# Altium PCB PCB1.PcbDoc (part 1 of 4)
Units mil, origin at the board's own origin, x right, y up, seen from the top; angles counter-clockwise.
Board outline 3904 x 3805 mil, 4 copper layers (Top Layer, Layer 2, Layer 3, Bottom Layer), stack 23.756 mil thick; 231 components, 342 nets, 1187 pads, 543 vias.
Unrouted connection lines stored in the file: 4.
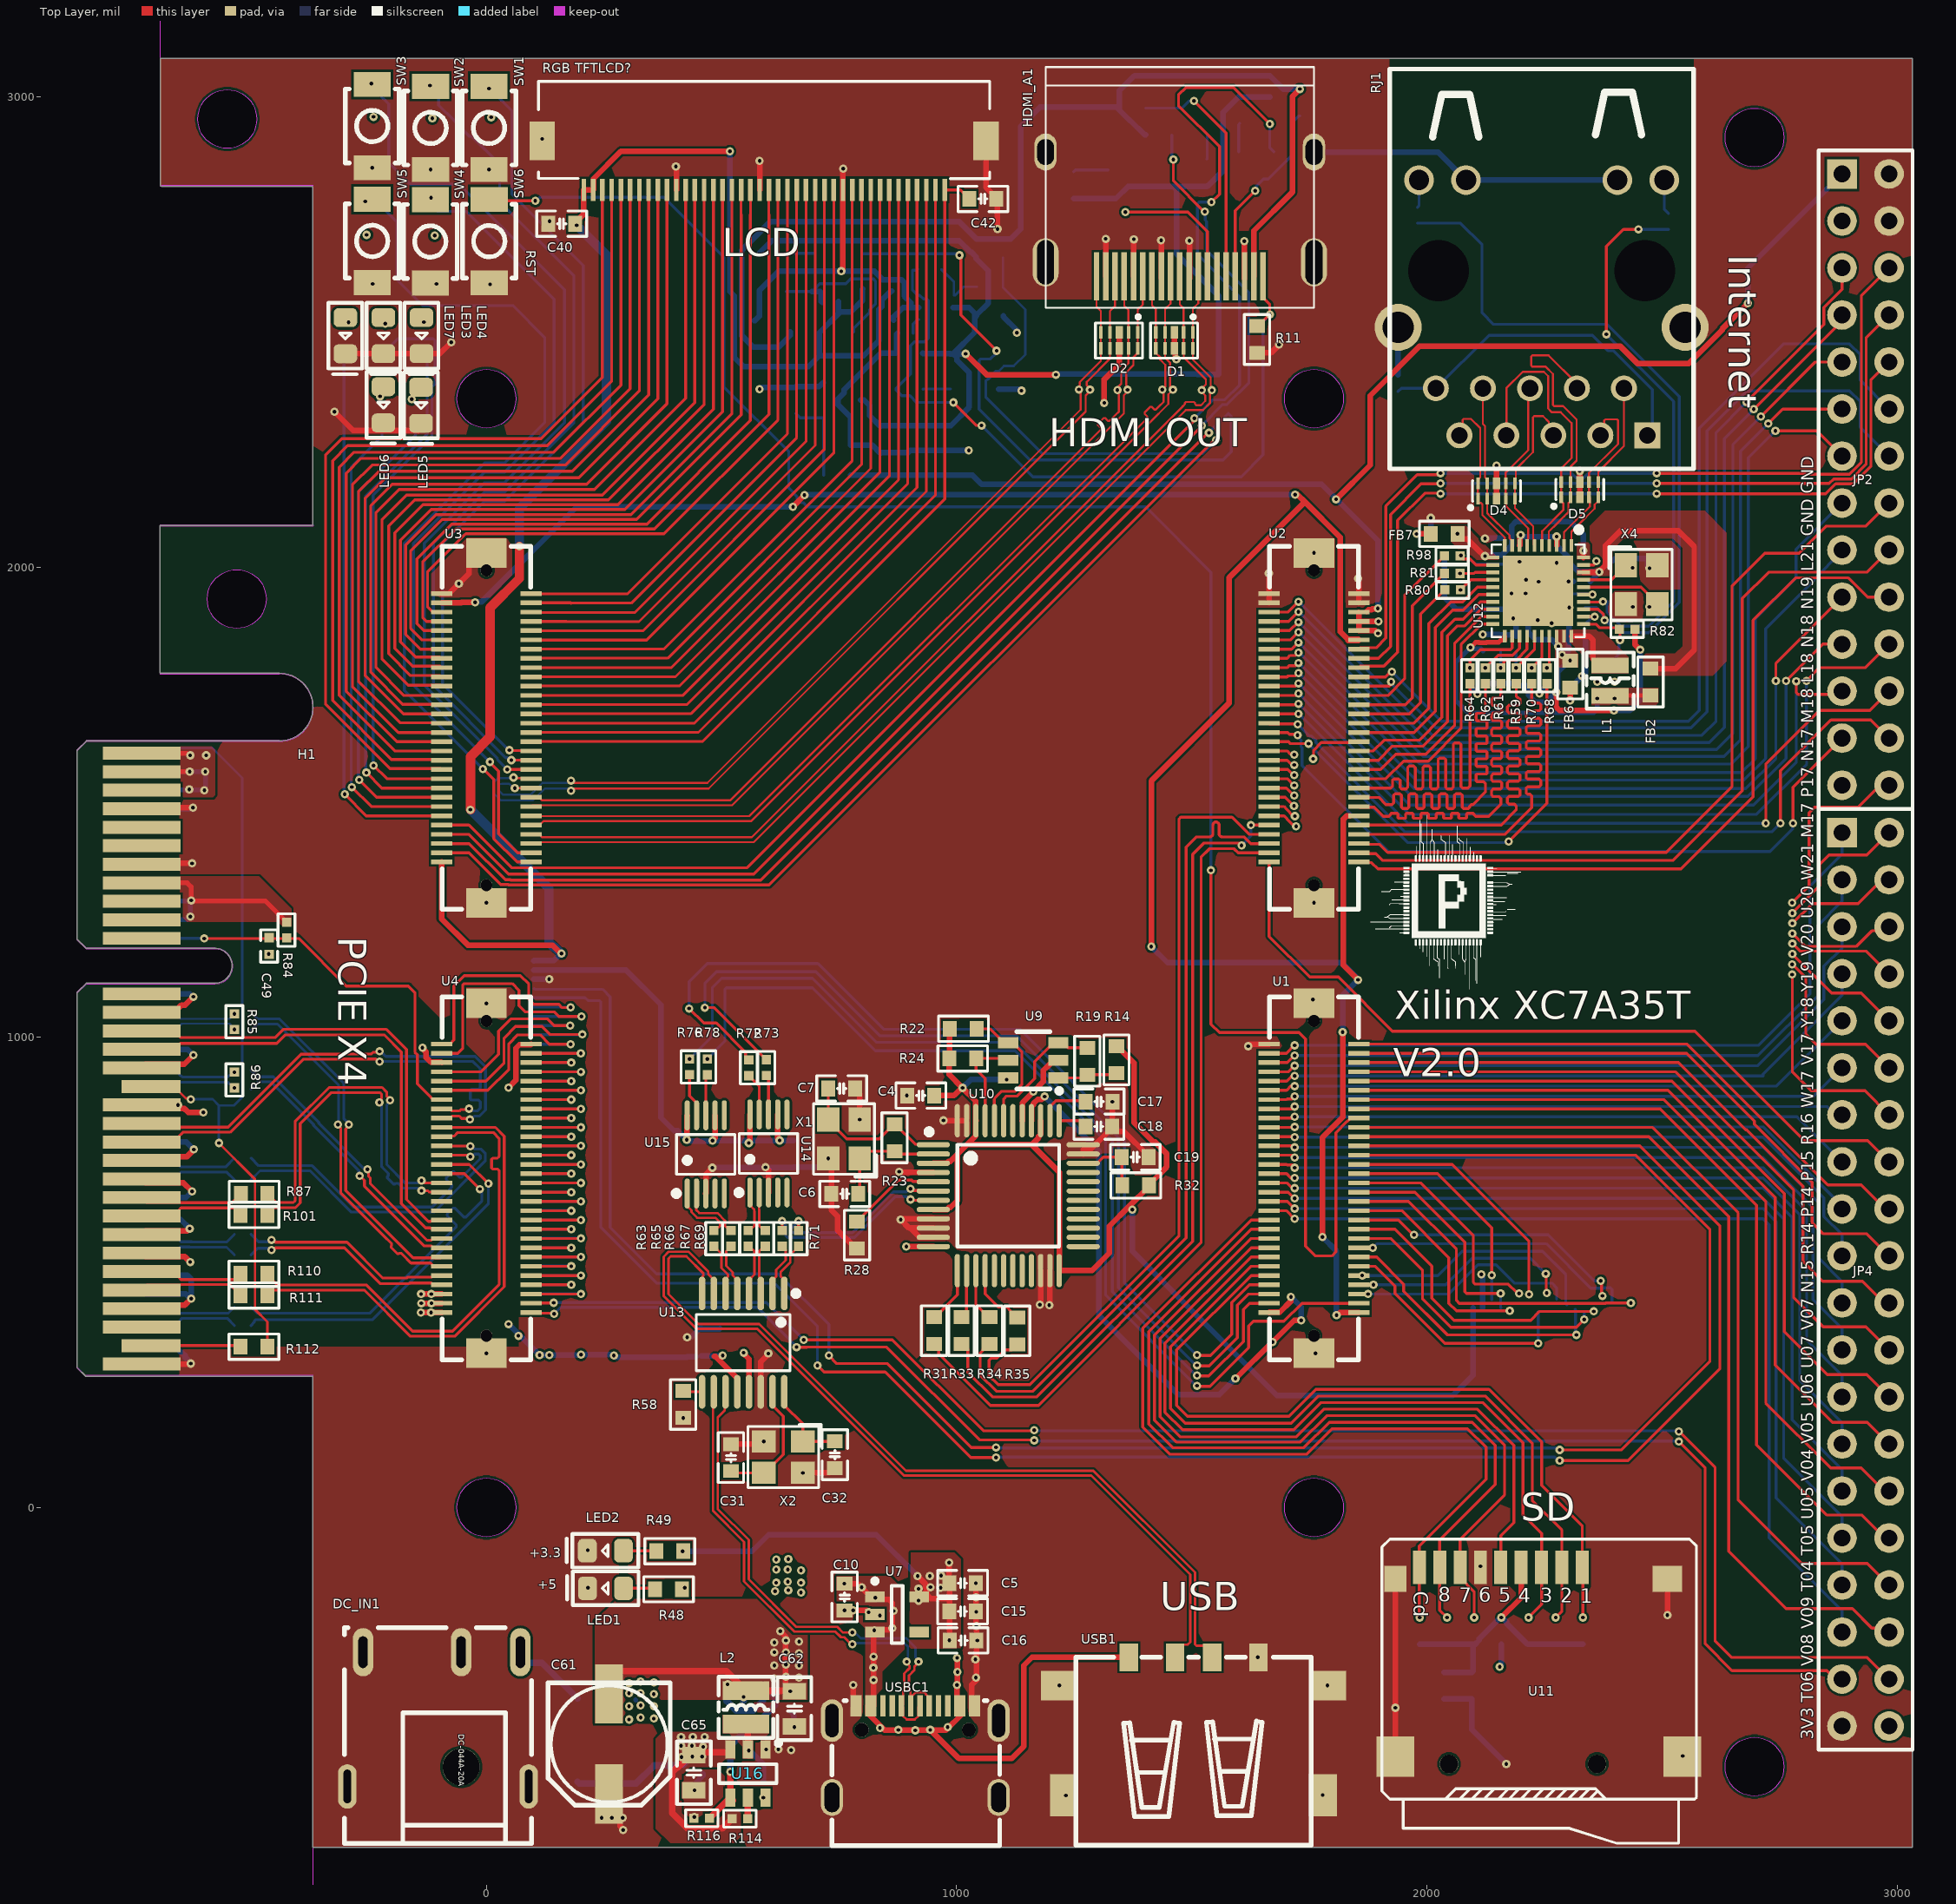
[diagram p0: Top Layer view]
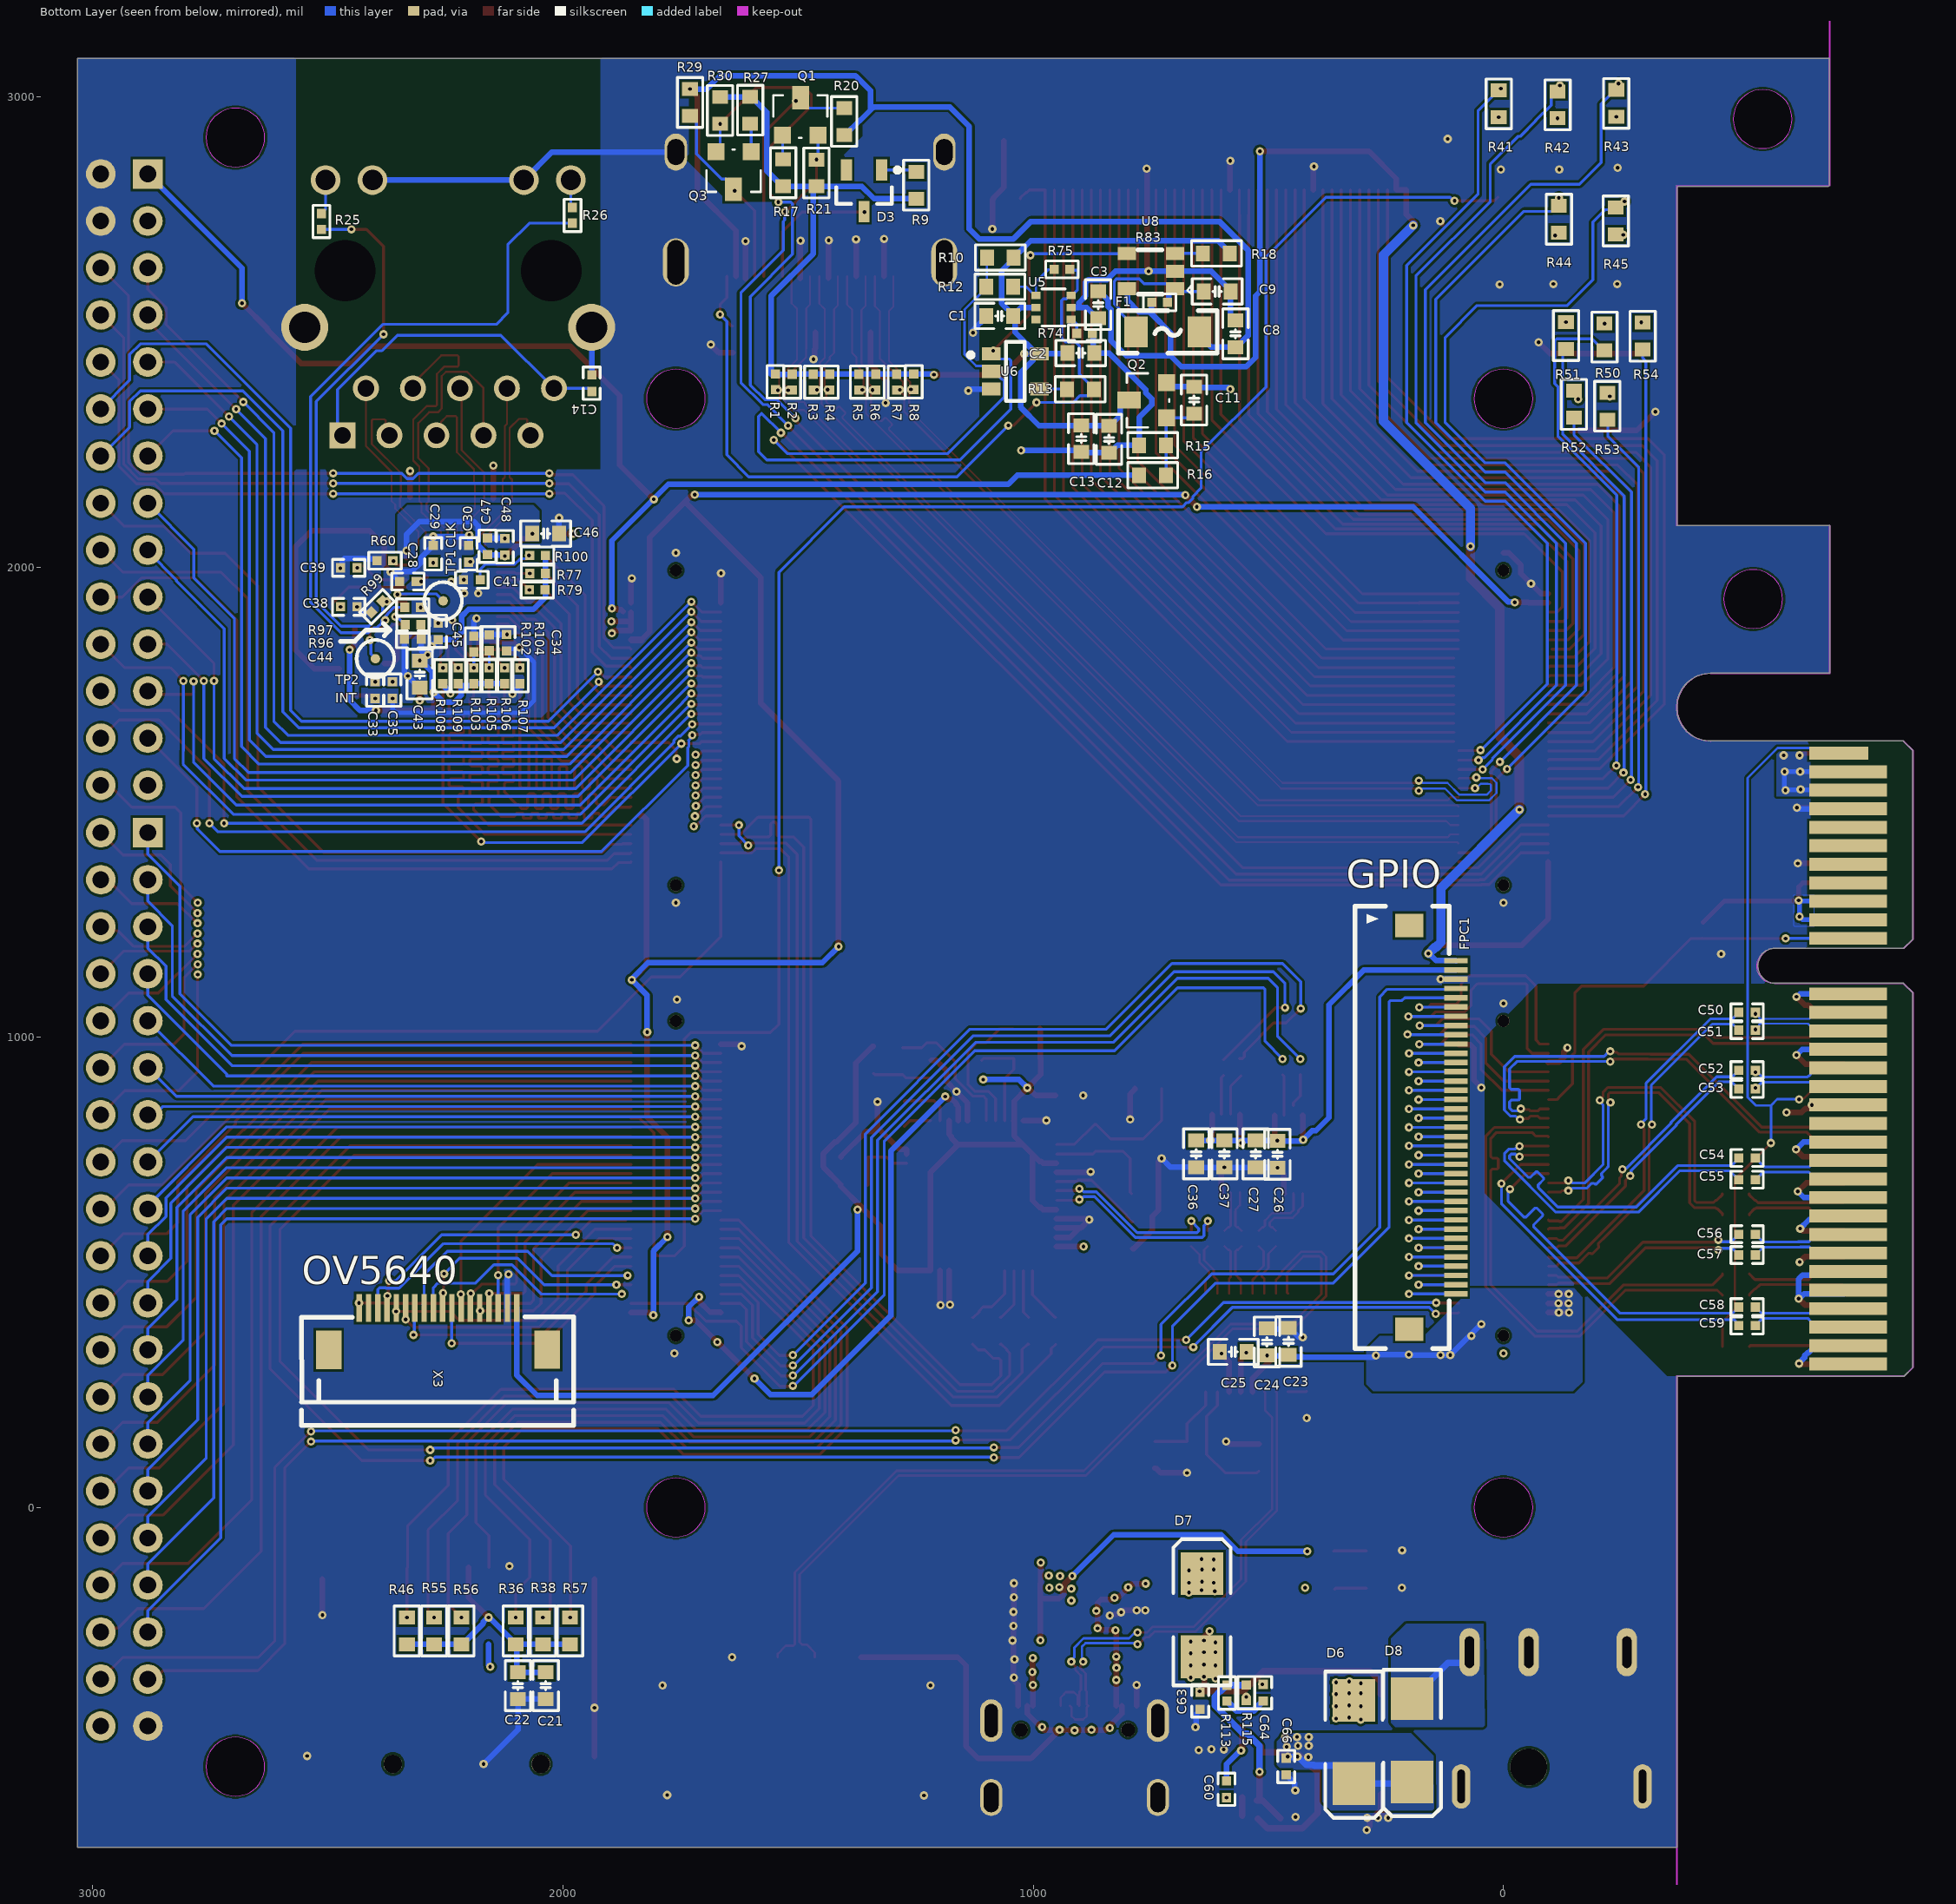
[diagram p1: Bottom Layer view, seen from below]
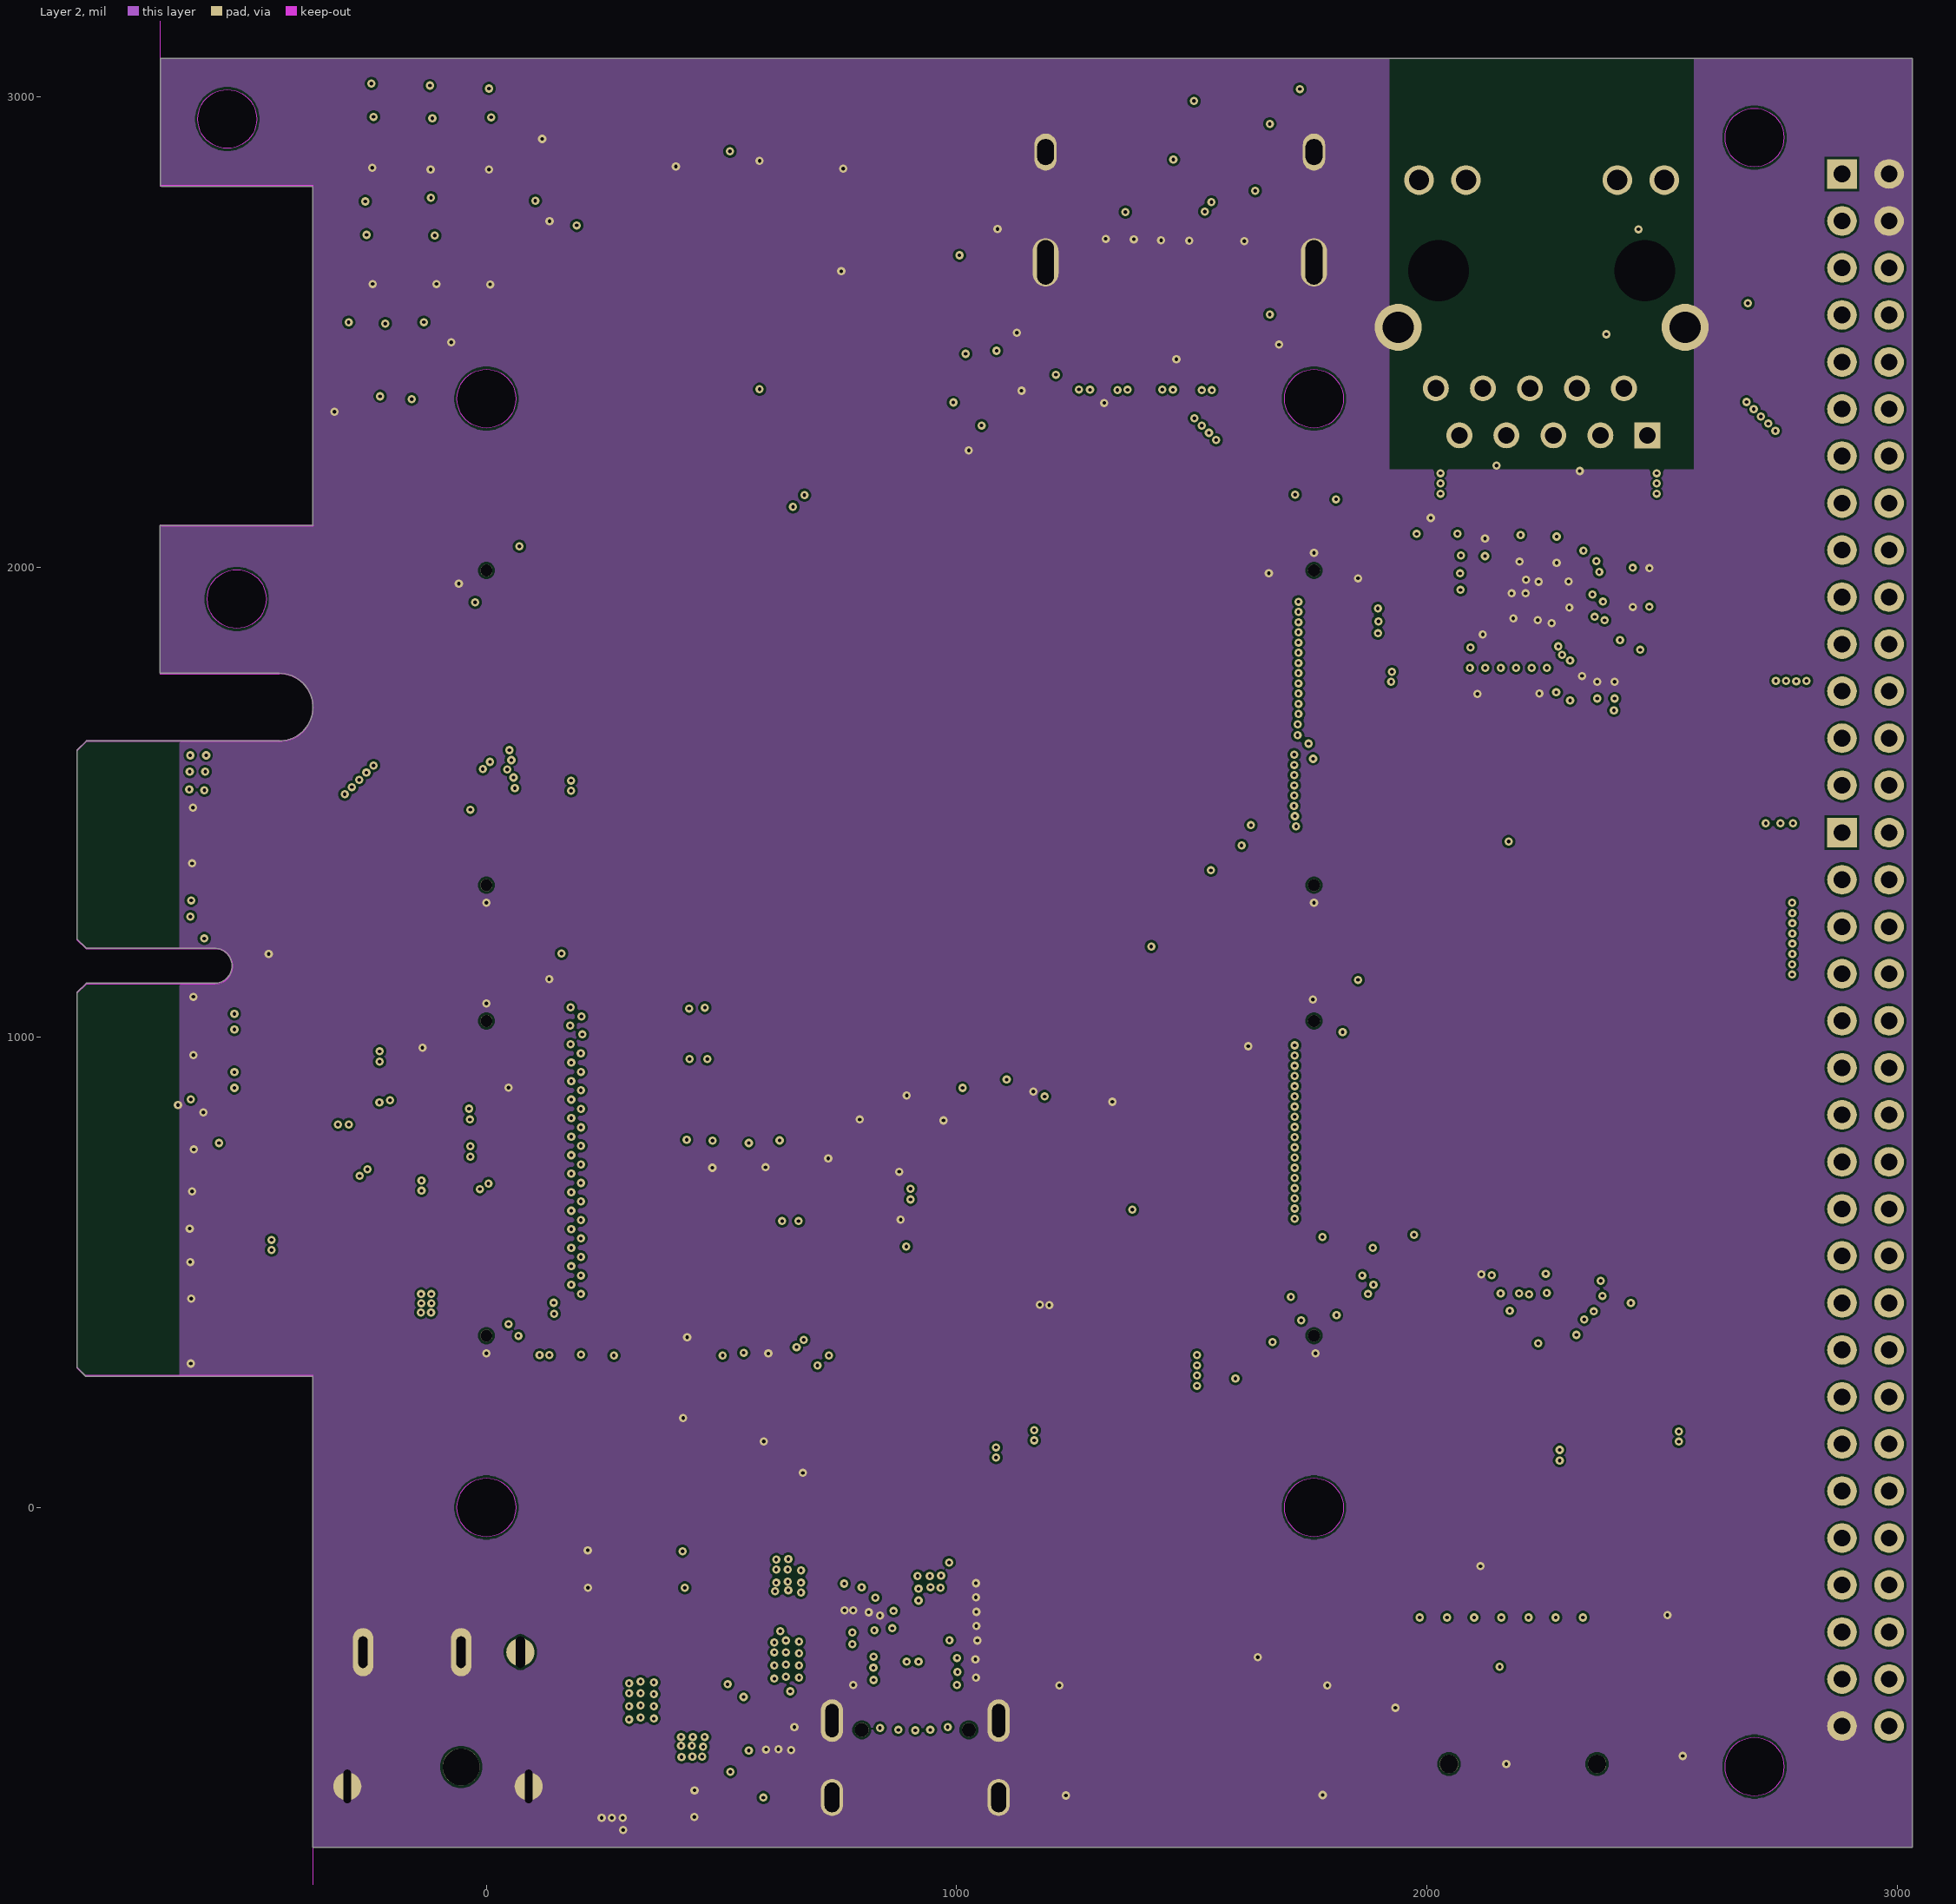
[diagram p2: Layer 2]
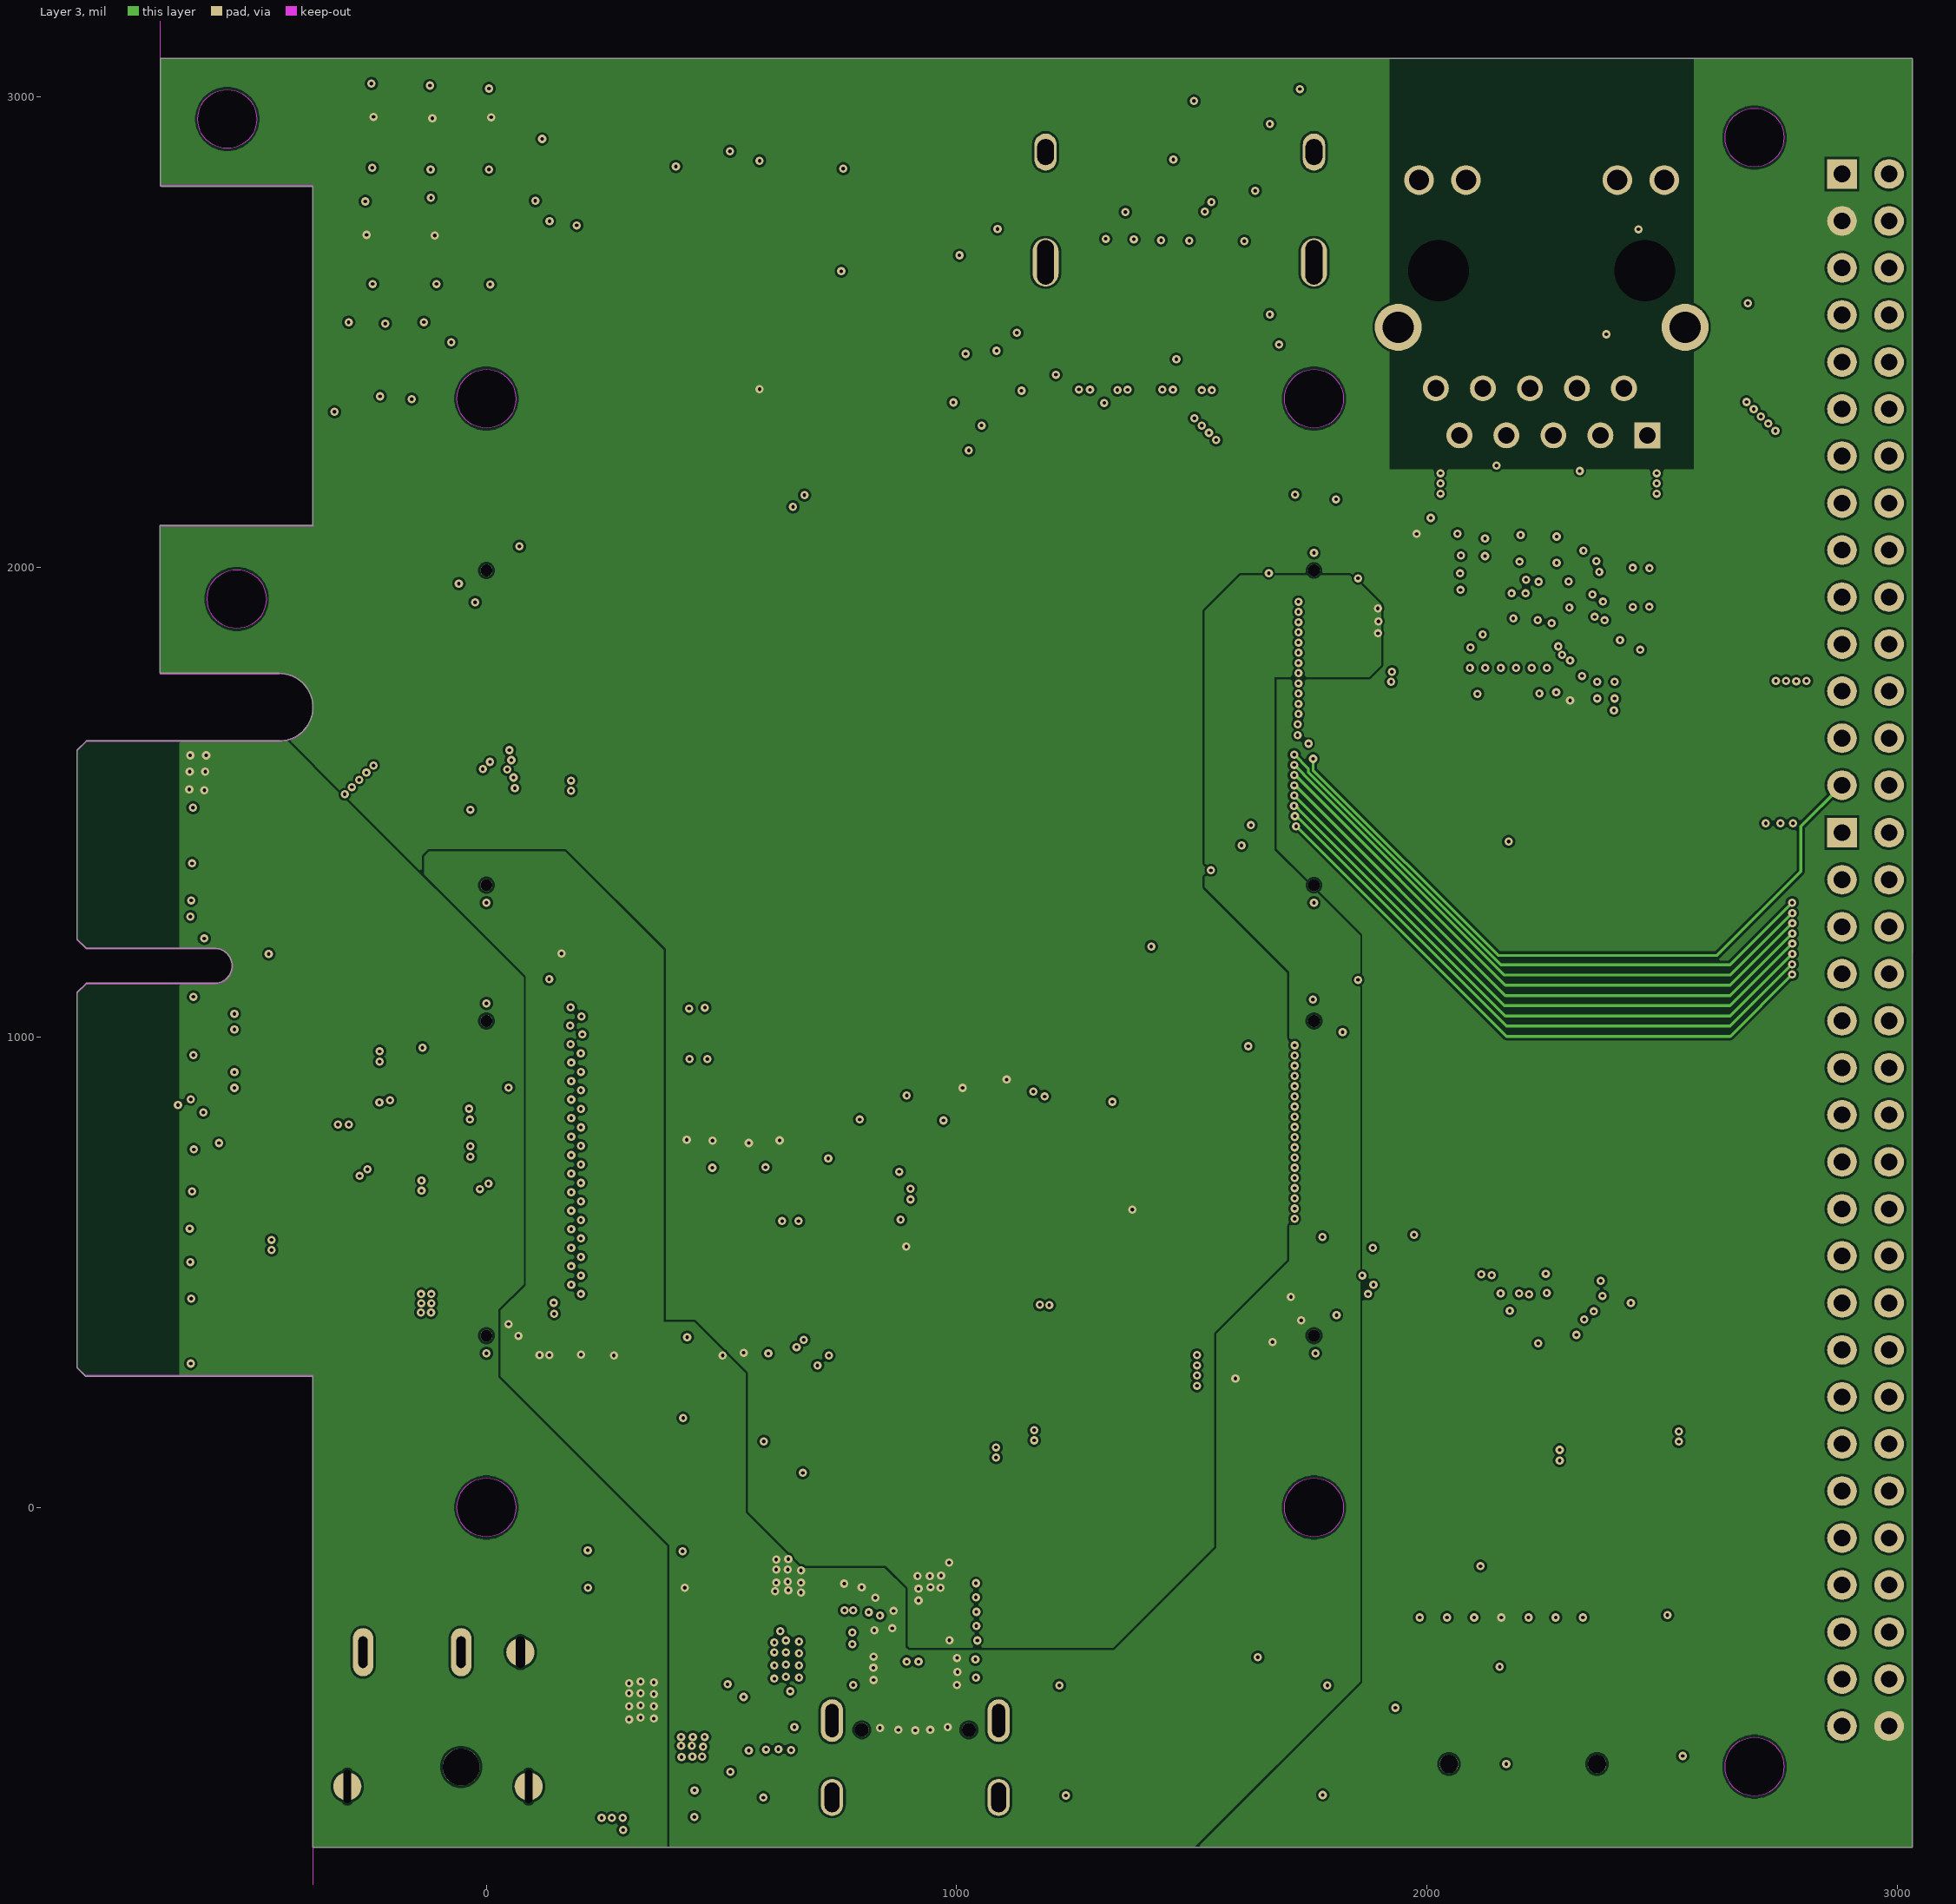
[diagram p3: Layer 3]

## Layer stack, top to bottom
Top Solder: solder mask 0.4, Solder Resist, Dk 3.5
Top Layer: signal copper 1.4
Dielectric 4: prepreg 2.8, PP-006, Dk 4.1
Layer 2: signal copper 1.378
Dielectric 1: dielectric 12.6, FR-4, Dk 4.8
Layer 3: signal copper 1.378
Dielectric 5: prepreg 2.8, PP-006, Dk 4.1
Bottom Layer: signal copper 1.4
Bottom Solder: solder mask 0.4, Solder Resist, Dk 3.5

## Board outline
-871,298 -852,279 -369,279 -369,-723 3033,-723 3033,3082 -693,3082 -693,2811 -691,2809 -370,2809 -369,2808 -369,2089 -370,2088 -694,2088 -694,1774 -441,1774 cw(c-441,1701.99) -441,1629.99 -851.01,1629.99 -871,1610 -871,1209 -851,1189 -578,1189 cw(c-578,1152) -578,1115 -851,1115 -871,1095
cut-out: 2696.85,2850.89 cw(c2696.85,2913.39) 2634.35,2913.39 cw(c2696.85,2913.39) 2696.85,2975.89 cw(c2696.85,2913.39) 2759.35,2913.39 cw(c2696.85,2913.39)
cut-out: 1760,2295.5 cw(c1760,2358) 1697.5,2358 cw(c1760,2358) 1760,2420.5 cw(c1760,2358) 1822.5,2358 cw(c1760,2358)
cut-out: 2696.85,-613.68 cw(c2696.85,-551.18) 2634.35,-551.18 cw(c2696.85,-551.18) 2696.85,-488.68 cw(c2696.85,-551.18) 2759.35,-551.18 cw(c2696.85,-551.18)
cut-out: 1760,-62.5 cw(c1760,0) 1697.5,0 cw(c1760,0) 1760,62.5 cw(c1760,0) 1822.5,0 cw(c1760,0)
cut-out: 0,-62.5 cw(c0,0) -62.5,0 cw(c0,0) 0,62.5 cw(c0,0) 62.5,0 cw(c0,0)
cut-out: -531,1869.5 cw(c-531,1932) -593.5,1932 cw(c-531,1932) -531,1994.5 cw(c-531,1932) -468.5,1932 cw(c-531,1932)
cut-out: 0,2295.5 cw(c0,2358) -62.5,2358 cw(c0,2358) 0,2420.5 cw(c0,2358) 62.5,2358 cw(c0,2358)
cut-out: -551.18,2890.26 cw(c-551.18,2952.76) -613.68,2952.76 cw(c-551.18,2952.76) -551.18,3015.26 cw(c-551.18,2952.76) -488.68,2952.76 cw(c-551.18,2952.76)

## Design rules (kind name [scope] priority, off if disabled: settings)
Clearance via_poly [IsVia vs InPoly] p1: gap=5 ignorepadtopadclearanceinfootprint=FALSE
Clearance poly [InPoly] p2: gap=5 ignorepadtopadclearanceinfootprint=FALSE
Clearance Clearance_all [All] p3: gap=4 ignorepadtopadclearanceinfootprint=FALSE
DiffPairsRouting 85ohm [InDifferentialPairClass('7a.PCIE_data')] p1: maxlimit=8 minlimit=5 mostfreqgap=8 toplayer_prefgap=5 toplayer_minwidth=5.88 toplayer_maxwidth=5.88 toplayer_prefwidth=5.88 midlayer1_prefgap=5 midlayer1_minwidth=5.88 midlayer1_maxwidth=5.88 midlayer1_prefwidth=5.88 midlayer2_prefgap=5 midlayer2_minwidth=5.88 midlayer2_maxwidth=5.88 midlayer2_prefwidth=5.88 bottomlayer_minwidth=5.88 bottomlayer_maxwidth=5.88 bottomlayer_prefwidth=5.88 maxuncoupledlength=500
DiffPairsRouting 90ohm [InDifferentialPairClass('6.USB')] p2: maxlimit=8 minlimit=5 mostfreqgap=5 toplayer_minwidth=5.1 toplayer_maxwidth=5.1 toplayer_prefwidth=5.1 midlayer1_minwidth=5.1 midlayer1_maxwidth=5.1 midlayer1_prefwidth=5.1 midlayer2_minwidth=5.1 midlayer2_maxwidth=5.1 midlayer2_prefwidth=5.1 bottomlayer_minwidth=5.1 bottomlayer_maxwidth=15 bottomlayer_prefwidth=5.1 maxuncoupledlength=500
DiffPairsRouting 100ohm [InDifferentialPairClass('1.HDMI') or InDifferentialPairClass('3.PHY') or InDifferentialPairClass('7b.PCIE_clk')] p3: maxlimit=11 minlimit=6 mostfreqgap=6 toplayer_minwidth=4.29 toplayer_maxwidth=4.29 toplayer_prefwidth=4.29 midlayer1_minwidth=4.29 midlayer1_maxwidth=4.29 midlayer1_prefwidth=4.29 midlayer2_minwidth=4.29 midlayer2_maxwidth=4.29 midlayer2_prefwidth=4.29 bottomlayer_minwidth=4.29 bottomlayer_maxwidth=4.29 bottomlayer_prefwidth=4.29 maxuncoupledlength=500
PlaneClearance [All] p1: clearance=7
PlaneConnect [All] p1: planeconnectstyle=Direct reliefexpansion=20 reliefentries=4 reliefconductorwidth=10 reliefairgap=10
PolygonConnect [All] p1: connectstyle=Direct reliefconductorwidth=10 reliefentries=4 polygonreliefangle="90 Angle" airgapwidth=10
RoutingVias [All] p1: holewidth=7.9 width=17.7 viastyle="Through Hole" minholewidth=7.9 minwidth=17.7 maxholewidth=7.9 maxwidth=17.7
SolderMaskExpansion [All] p1: expansion=4 istentingtop=FALSE
Width 50ohm [InNetClass('2.RGMII') or InNetClass('4.CMOS') or InNetClass('5.jtag')] p1: maxlimit=6.16 minlimit=6.16 preferedwidth=6.16 minimp=50.000000 maximp=50.000000 favimp=50.000000
Width power [InNetClass('8.power')] p2: maxlimit=20 minlimit=10 preferedwidth=12 minimp=50.000000 maximp=50.000000 favimp=50.000000
Width [All] p3: maxlimit=14 minlimit=5 preferedwidth=6.16
27 further rules are at their usual default settings.

## Classes and differential pairs
differential pair class 7b.PCIE_clk: MGT_CLK0 MGT_CLK0_R MGT_CLK1
differential pair class 6.USB: EXTUSB JTAG_USB JTAG_USB_R typec UART1_USB UART1_USB_R UART2_USB UART2_USB_R
net class 6.USB: EXTUSB_D+ EXTUSB_D- JTAG_DM JTAG_DM_R JTAG_DP JTAG_DP_R UART1_D+ UART1_D+_R UART1_D- UART1_D-_R UART2_D+ UART2_D+_R UART2_D- UART2_D-_R USB_DM USB_DP
net class 1.HDMI: B16_N_L18 B16_N_L20 B16_N_L22 B16_N_L23 B16_P_L18 B16_P_L20 B16_P_L22 B16_P_L23
net class 3.PHY: PHY2_MDI0N PHY2_MDI0P PHY2_MDI1N PHY2_MDI1P PHY2_MDI2N PHY2_MDI2P PHY2_MDI3N PHY2_MDI3P
differential pair class 7a.PCIE_data: MGT_CLK0 MGT_CLK1 MGT_RX_0 MGT_RX_0_R MGT_RX_1 MGT_RX_1_R MGT_RX_2 MGT_RX_3 MGT_TX_0 MGT_TX_0_R MGT_TX_1 MGT_TX_1_R MGT_TX_2 MGT_TX_2_R MGT_TX_3 MGT_TX_3_R
net class 7.PCIE: MGT_CLK0_N MGT_CLK0_N_R MGT_CLK0_P MGT_CLK0_P_R MGT_CLK1_N MGT_CLK1_P MGT_RX_N_0 MGT_RX_N_0_R MGT_RX_N_1 MGT_RX_N_1_R MGT_RX_N_2 MGT_RX_N_3 MGT_RX_P_0 MGT_RX_P_0_R MGT_RX_P_1 MGT_RX_P_1_R MGT_RX_P_2 MGT_RX_P_3 MGT_TX_N_0 MGT_TX_N_0_R MGT_TX_N_1 MGT_TX_N_1_R MGT_TX_N_2 MGT_TX_N_2_R MGT_TX_N_3 MGT_TX_N_3_R MGT_TX_P_0 MGT_TX_P_0_R MGT_TX_P_1 MGT_TX_P_1_R MGT_TX_P_2 MGT_TX_P_2_R MGT_TX_P_3 MGT_TX_P_3_R
net class 4.CMOS: B34_N_L1 B34_N_L5 B34_N_L7 B34_N_L8 B34_N_L9 B34_N_L11 B34_P_L5 B34_P_L7 B34_P_L8 B34_P_L10 B34_P_L20
net class 2.RGMII: B14_N_L6 B14_N_L9 B14_N_L10 B14_N_L14 B14_N_L18 B14_N_L20 B14_P_L8 B14_P_L9 B14_P_L10 B14_P_L12 B14_P_L14 B14_P_L18 PHY_RXCLK/PHYAD1 PHY_RXCLK/PHYAD2 PHY_RXD0/RXDLY PHY_RXD1/TXDLY PHY_RXD2/PLLOFF PHY_RXD3/PHYD0
differential pair class 3.PHY: PHY2_MDI0 PHY2_MDI1 PHY2_MDI2 PHY2_MDI3
differential pair class 1.HDMI: HDMI_CLK HDMI_D0 HDMI_D1 HDMI_D2
net class 5.jtag: FPGA_TCK FPGA_TCK_R FPGA_TDI FPGA_TDI_R FPGA_TDO FPGA_TDO_R FPGA_TMS FPGA_TMS_R
net class 8.power: 1V05_AVDD_GMII 1V05_DVDD_GMII 3V3_PCIE 12V_PCIE +3.3 +3.3_AVDD_GMII +3.3_board +3.3_DVDD_GMII +3.3_hdmi +5 +5_hdmi GND
differential pair MGT_CLK0_R: +MGT_CLK0_P_R -MGT_CLK0_N_R
differential pair MGT_CLK1: +MGT_CLK1_P -MGT_CLK1_N
differential pair MGT_CLK0: +MGT_CLK0_P -MGT_CLK0_N
differential pair JTAG_USB_R: +JTAG_DP_R -JTAG_DM_R
differential pair UART1_USB_R: +UART1_D+_R -UART1_D-_R
differential pair UART2_USB_R: +UART2_D+_R -UART2_D-_R
differential pair JTAG_USB: +JTAG_DP -JTAG_DM
differential pair UART1_USB: +UART1_D+ -UART1_D-
differential pair UART2_USB: +UART2_D+ -UART2_D-
differential pair EXTUSB: +EXTUSB_D+ -EXTUSB_D-
differential pair typec: +USB_DP -USB_DM
differential pair MGT_TX_2_R: +MGT_TX_P_2_R -MGT_TX_N_2_R
differential pair MGT_TX_3_R: +MGT_TX_P_3_R -MGT_TX_N_3_R
differential pair MGT_TX_1_R: +MGT_TX_P_1_R -MGT_TX_N_1_R
differential pair MGT_TX_0_R: +MGT_TX_P_0_R -MGT_TX_N_0_R
differential pair MGT_TX_3: +MGT_TX_P_3 -MGT_TX_N_3
differential pair MGT_TX_2: +MGT_TX_P_2 -MGT_TX_N_2
differential pair MGT_TX_1: +MGT_TX_P_1 -MGT_TX_N_1
differential pair MGT_TX_0: +MGT_TX_P_0 -MGT_TX_N_0
differential pair MGT_RX_0_R: +MGT_RX_P_0_R -MGT_RX_N_0_R
differential pair MGT_RX_1_R: +MGT_RX_P_1_R -MGT_RX_N_1_R
differential pair MGT_RX_3: +MGT_RX_P_3 -MGT_RX_N_3
differential pair MGT_RX_2: +MGT_RX_P_2 -MGT_RX_N_2
differential pair MGT_RX_1: +MGT_RX_P_1 -MGT_RX_N_1
differential pair MGT_RX_0: +MGT_RX_P_0 -MGT_RX_N_0
differential pair PHY2_MDI3: +PHY2_MDI3N -PHY2_MDI3P
differential pair PHY2_MDI2: +PHY2_MDI2P -PHY2_MDI2N
differential pair PHY2_MDI1: +PHY2_MDI1P -PHY2_MDI1N
differential pair PHY2_MDI0: +PHY2_MDI0P -PHY2_MDI0N
differential pair JTAG: +JTAG_DP -JTAG_DM
differential pair HDMI_CLK: +B16_P_L20 -B16_N_L20
differential pair HDMI_D0: +B16_N_L23 -B16_P_L23
differential pair HDMI_D1: +B16_P_L22 -B16_N_L22
differential pair HDMI_D2: +B16_N_L18 -B16_P_L18

## Components (designator, comment, footprint, x,y, rotation, side; value= is the part's Value field where it differs from the comment)
C1 "100nf/NC" C0603_L 1071,2534 r0 bottom
C2 "100nf/NC" C0603_L 899,2455 r0 bottom
C3 "100nf" C0603_L 861.87,2558 r90 bottom
C4 "100nf" C0603_L 924,876 r0 top
C5 "1uf" C0603_L 1012.69,-160.87 r180 top
C6 "33pf" C0603_L 762,667 r180 top
C7 "33pf" C0603_L 755.54,891 r0 top
C8 "100nf" C0603_L 569.87,2496 r270 bottom
C9 "10uf" C0603_L 608.87,2586 r0 bottom
C10 "1uf" C0603_L 761.69,-190.32 r90 top
C11 "10nf" C0603_L 658,2355 r270 bottom
C12 "100nf" C0603_L 839,2271.46 r90 bottom
C13 "100nf" C0603_L 898,2273 r90 bottom
C14 "100nf" C0402_L 1939,2391 r90 bottom
C15 "10uf" C0603_L 1012.69,-220.87 r180 top
C16 "100nf" C0603_L 1013.69,-282.87 r180 top
C17 "100nf" C0603_L 1303,863 r0 top
C18 "100nf" C0603_L 1302.54,810 r0 top
C19 "100nf" C0603_L 1380,745 r180 top
C21 "100nf" C0603_L 2037,-379 r90 bottom
C22 "10uf" C0603_L 2096,-379 r90 bottom
C23 "10uf" C0603_L 457,353 r270 bottom
C24 "100nf" C0603_L 503,352 r270 bottom
C25 "10uf" C0603_L 574.53,331 r0 bottom
C26 "100nf" C0603_L 480.53,751 r90 bottom
C27 "10uf" C0603_L 527,752 r90 bottom
C28 "10uf" C0402_L 2329.8,1969.43 r0 bottom
C29 "100nf" C0402_L 2276.17,2028.17 r90 bottom
C30 "100nf" C0402_L 2201,2028 r90 bottom
C31 "33pf" C0603_L 520.07,106.12 r90 top
C32 "33pf" C0603_L 741.07,112.12 r270 top
C33 "10uf" C0402_L 2399.8,1738.15 r270 bottom
C34 "100nf" C0402_L 2120,1839 r270 bottom
C35 "100nf" C0402_L 2362.8,1738.15 r270 bottom
C36 "100nf" C0603_L 653.53,752 r90 bottom
C37 "10uf" C0603_L 593.53,752 r90 bottom
C38 "6pf" C0402_L 2455.8,1915.43 r0 bottom
C39 "6pf" C0402_L 2455.8,1998.43 r180 bottom
C40 "100nf" C0603_L 160,2730 r0 top
C41 "100nf" C0402_L 2194,1973 r180 bottom
C42 "1uf" C0603_L 1056,2783 r0 top
C43 "10uf" C0603_L 2304.8,1772.43 r270 bottom
C44 "100nf" C0402_L 2319.52,1846.43 r0 bottom
C45 "100nf" C0402_L 2265.8,1863.15 r90 bottom
C46 "10uf" C0603_L 2037,2071 r0 bottom
C47 "100nf" C0402_L 2160.8,2044.15 r270 bottom
C48 "100nf" C0402_L 2123.8,2043.15 r270 bottom
C49 "100nf" C0402_L -462,1194.13 r90 top
C50 "100nf" C0402_L -518.29,1053 r180 bottom
C51 "100nf" C0402_L -518.28,1015 r180 bottom
C52 "100nf" C0402_L -518.28,930 r180 bottom
C53 "100nf" C0402_L -518.29,890 r180 bottom
C54 "100nf" C0402_L -518.28,743 r180 bottom
C55 "100nf" C0402_L -518.29,697 r180 bottom
C56 "100nf" C0402_L -518.29,581 r180 bottom
C57 "100nf" C0402_L -518.29,537 r180 bottom
C58 "100nf" C0402_L -518.28,426 r180 bottom
C59 "100nf" C0402_L -518.29,387 r180 bottom
C60 "100nf" C0402_L 589,-599.28 r270 bottom
C61 "470uF" "CM D(6.3*5.4)" 261,-503 r270 top
C62 "22uf" C0805_L 655,-428 r90 top
C63 "100nf" C0402_L 645,-411.28 r270 bottom
C64 "NC" C0402_L 511,-394 r270 bottom
C65 "22uf" C0805_L 441,-564 r90 top
C66 "100nf" C0402_L 462,-551 r270 bottom
D1 "AZ1045-04F.R7G" DFN2510P10E 1505.32,2529.37 r180 top
D2 "AZ1045-04F.R7G" DFN2510P10E 1388.32,2529.37 r180 top
D3 "Diode BAS16" SOT-23_N 1359.69,2800 r270 bottom
D4 "AZ1143-04F_C42377645" DFN-10_L2.5-W1.0-P0.50-BL-A 2145.8,2156.43 r0 top
D5 "AZ1143-04F_C42377645" DFN-10_L2.5-W1.0-P0.50-BL-A 2322.8,2159.43 r0 top
D6 "SS24" SMB 318,-498.58 r270 bottom
D7 "SS24" SMB 641,-229 r90 bottom
D8 "SS24" SMB 194,-495 r270 bottom
DC_IN1 "DC-044A-20A" dc_in_th_3p_10r1x11r6 -105,-482 r90 top
F1 "PTS120630V012" "FU 1206" 713.87,2500 r180 bottom
FB2 "120R,2A" FB0603 2475.8,1755.43 r270 top
FB6 "120R,2A" FB0603 2304.8,1772.43 r270 top
FB7 "120R,2A" FB0603 2037.26,2070.43 r180 top
FPC1 "0.5K-DX-37PWBG" FPC-SMD_37P-P0.50_DEALON_0.5K-DX-37PWB 198.7,808.48 r270 bottom
H1 "PCIEX4" PCIEX4 -678,2300 r270 top
HDMI_A1 "HDMI" HDMI_SMD_A 1760.06,3063.28 r180 top
JP2 "Header 2X11" HDR2.54-LI-2x14P 2933.07,2186 r270 top
JP4 "Header 2X11" HDR2.54-LI-2x20P 2933.07,485 r270 top
L1 "4.7uH" NR2520 2389.8,1758.43 r270 top
L2 "4.7uH" L-2520 552,-425 r90 top
LED1 "绿色" LED0805_G 253.4,-172 r180 top
LED2 "绿色" LED0805_G 253,-92 r180 top
LED3 "绿色" LED0805_G -219,2492.13 r270 top
LED4 "绿色" LED0805_G -138,2492.13 r270 top
LED5 "绿色" LED0805_G -139,2344 r270 top
LED6 "绿色" LED0805_G -219,2345 r270 top
LED7 "绿色" LED0805_G -300,2492 r270 top
Q1 "AO3400" SOT23 1533,2918 r180 bottom
Q2 "AO3400" SOT23 716,2317 r90 bottom
Q3 "AO3400" SOT23 1599.79,2883.02 r0 bottom
R1 "49.9" R0402_L 1548,2394 r90 bottom
R2 "49.9" R0402_L 1512.57,2393.3 r90 bottom
R3 "49.9" R0402_L 1468.14,2393.3 r90 bottom
R4 "49.9" R0402_L 1433,2393.27 r90 bottom
R5 "49.9" R0402_L 1371,2393.27 r90 bottom
R6 "49.9" R0402_L 1334.86,2393.3 r90 bottom
R7 "49.9" R0402_L 1290.43,2393.3 r90 bottom
R8 "49.9" R0402_L 1254,2394 r90 bottom
R9 "27K" R0603_L 1248.69,2812 r270 bottom
R10 "10k" R0603_L 1070,2658 r180 bottom
R11 "100K" R0603_L 1639,2484 r90 top
R12 "1k" R0603_L 1071,2596 r0 bottom
R13 "1k/NC" R0603_L 900,2378 r180 bottom
R14 "10k" R0603_L 1340,952 r90 top
R15 "100k" R0603_L 746,2259 r180 bottom
R16 "1k" R0603_L 746,2195 r0 bottom
R17 "10k" R0603_L 1532,2838.54 r90 bottom
R18 "1k/NC" R0603_L 610.33,2667 r0 bottom
R19 "10k" R0603_L 1278,949 r270 top
R20 "2.2k" R0603_L 1402,2947.54 r90 bottom
R21 "2.2k" R0603_L 1461,2838 r90 bottom
R22 "10k" R0603_L 1014.46,1018 r0 top
R23 "1M" R0603_L 868,786 r90 top
R24 "10k" R0603_L 1013,955 r0 top
R25 "510" R0402_L 2514,2735 r90 bottom
R26 "510" R0402_L 1980,2748 r90 bottom
R27 "10k" R0603_L 1602,2971.54 r270 bottom
R28 "12K" R0603_L 788,579.13 r90 top
R29 "2.2k" R0603_L 1730,2988 r270 bottom
R30 "2.2k" R0603_L 1666,2971 r270 bottom
R31 "100" R0603_L 952.13,376 r90 top
R32 "47k" R0603_L 1381,685 r0 top
R33 "100" R0603_L 1010.13,376 r90 top
R34 "100" R0603_L 1070,376 r90 top
R35 "100" R0603_L 1129,375.46 r90 top
R36 "4.7k" R0603_L 2100.67,-262.54 r270 bottom
R38 "4.7k" R0603_L 2042.83,-262.54 r270 bottom
R41 "10k" R0603_L 10,2985 r270 bottom
R42 "10k" R0603_L -115,2983 r270 bottom
R43 "10k" R0603_L -240,2986 r270 bottom
R44 "10k" R0603_L -118,2739.54 r270 bottom
R45 "10k" R0603_L -239,2736 r270 bottom
R46 "4.7k" R0603_L 2332,-262.54 r270 bottom
R48 "1k" R0603_L 387.54,-174 r0 top
R49 "1k" R0603_L 390,-93 r0 top
R50 "1k" R0603_L -215,2489.13 r270 bottom
R51 "1k" R0603_L -133,2492.13 r270 bottom
R52 "1k" R0603_L -150,2346 r270 bottom
R53 "1k" R0603_L -221,2342 r270 bottom
R54 "1k" R0603_L -296,2491 r270 bottom
R55 "4.7k" R0603_L 2274.17,-262.54 r270 bottom
R56 "4.7k" R0603_L 2216.33,-262.54 r270 bottom
R57 "4.7k" R0603_L 1985,-262.54 r270 bottom
R58 "2.7k" R0603_L 418.53,219 r90 top
R59 "22" R0402_L 2190.2,1768.7 r90 top
R60 "2.49k" R0402_L 2378.8,2013.43 r0 bottom
R61 "22" R0402_L 2157.4,1768.7 r90 top
R62 "22" R0402_L 2124.6,1768.7 r90 top
R63 "0" R0402_L 484,572 r90 top
R64 "22" R0402_L 2091.8,1768.7 r90 top
R65 "0" R0402_L 520.33,572 r90 top
R66 "0" R0402_L 556.93,572 r90 top
R67 "0" R0402_L 593,572 r90 top
R68 "22" R0402_L 2255.8,1768.7 r90 top
R69 "0" R0402_L 629,572 r90 top
R70 "22" R0402_L 2223,1768.7 r90 top
R71 "0" R0402_L 664,572 r90 top
R72 "470" R0402_L 558,935 r90 top
R73 "470" R0402_L 595.4,935.54 r90 top
R74 "1K/NC" R0402_L 891,2497 r0 bottom
R75 "0R" R0402_L 939,2633 r0 bottom
R76 "470" R0402_L 432,937 r90 top
R77 "1.5k" R0402_L 2054.21,1986.43 r0 bottom
R78 "470" R0402_L 469.65,936.87 r90 top
R79 "1.5k" R0402_L 2055,1952 r0 bottom
R80 "22" R0402_L 2055.21,1951.43 r0 top
R81 "22" R0402_L 2054.21,1986.43 r0 top
R82 "4.7k" R0402_L 2426,1868 r180 top
R83 "0R" R0402_L 731,2563 r180 bottom
R84 "10k" R0402_L -425,1228 r90 top
R85 "100R" R0402_L -536,1033 r90 top
R86 "100R" R0402_L -536,909 r270 top
R87 "0R" R0603_L -494,667 r180 top
R96 "10k" R0402_L 2319.07,1877.43 r180 bottom
R97 "10k" R0402_L 2319.8,1914.43 r180 bottom
R98 "0" R0402_L 2054,2024 r0 top
R99 "10k" R0402_L 2395.8,1915.43 r315 bottom
R100 "10k/NC" R0402_L 2054.21,2024.43 r0 bottom
R101 "0R" R0603_L -494.46,622 r180 top
R102 "4.7k/NC" R0402_L 2190,1836 r270 bottom
R103 "4.7K" R0402_L 2190,1768.7 r270 bottom
R104 "4.7k/NC" R0402_L 2157,1838.73 r270 bottom
R105 "4.7k" R0402_L 2157.2,1768.7 r270 bottom
R106 "4.7k" R0402_L 2124.4,1768.7 r270 bottom
R107 "4.7k" R0402_L 2091.8,1768.7 r270 bottom
R108 "4.7k" R0402_L 2255.8,1768.7 r270 bottom
R109 "4.7k" R0402_L 2222.8,1768.7 r90 bottom
R110 "0R" R0603_L -494.46,497 r180 top
R111 "0R" R0603_L -494.46,451 r180 top
R112 "0R/NC" R0603_L -494.46,342 r180 top
R113 "NC" R0402_L 588,-394.73 r270 bottom
R114 "100K" R0402_L 539,-662 r180 top
R115 "56K" R0402_L 547,-394 r270 bottom
R116 "10K" R0402_L 458,-661 r180 top
"RGB TFTLCD?" "RGBLCD" FPC-TOP40 207.13,2798 r0 top
RJ1 "HR911131A" HR911130C_RJ45 2244.29,2630 r180 top
SW1 "GT-TC029B-H020-L1N" SW-SMD_L3.9-W2.9-P4.15-LS5.0 5.43,2933.84 r90 top
SW2 "GT-TC029B-H020-L1N" SW-SMD_L3.9-W2.9-P4.15-LS5.0 -118.74,2933.84 r90 top
SW3 "GT-TC029B-H020-L1N" SW-SMD_L3.9-W2.9-P4.15-LS5.0 -242.91,2937.84 r90 top
SW4 "GT-TC029B-H020-L1N" SW-SMD_L3.9-W2.9-P4.15-LS5.0 -119.39,2692.38 r90 top
SW5 "GT-TC029B-H020-L1N" SW-SMD_L3.9-W2.9-P4.15-LS5.0 -243,2693.41 r90 top
SW6 "GT-TC029B-H020-L1N" SW-SMD_L3.9-W2.9-P4.15-LS5.0 6,2693 r90 top
TP1 "TEST" "TEST 1.6" 2255,1928 r90 bottom
TP2 "TEST" "TEST 1.6" 2399,1805 r270 bottom
U1 "BTB0.5-60F-2.0G" CONN-SMD_60P-P0.50_BTB0.5-60F-2.0G 1760,700 r90 top locked
U2 "BTB0.5-60F-2.0G" CONN-SMD_60P-P0.50_BTB0.5-60F-2.0G 1760,1658 r90 top locked
U3 "BTB0.5-60F-2.0G" CONN-SMD_60P-P0.50_BTB0.5-60F-2.0G 0,1658 r90 top locked
U4 "BTB0.5-60F-2.0G" CONN-SMD_60P-P0.50_BTB0.5-60F-2.0G 0,700 r90 top locked
U5 "NC7WZ07P6X/NC" NC7WZ07P6X 957,2552 r90 bottom
U6 "NC7SZ125M5X/NC" NC7SZ125M5X 1038,2416 r270 bottom
U7 "ME6211C33M5G" SOT-23-5 873.45,-227.46 r0 top
U8 "TPS2051BDBV/NC" TPS2051BDBV 741.87,2629 r0 bottom
U9 "93LC56BT-I/OT" SOT-23-6_L2.9-W1.6-P0.95-LS2.8-BR 1163.15,949.01 r0 top
U10 "FT232HL" LQFP-48_L7.0-W7.0-P0.50-LS9.0-TL 1108.37,663.12 r0 top
U11 "Micro SD" "Micro SD" 1933,-529.95 r0 top
U12 "YT8531C" "QFN40 5X5_N" 2236.8,1949.43 r180 top
U13 "HUB2.0FE8.1" SSOP-16_L4.9-W3.9-P0.64-LS6.0-BL 18550.44,-13133.64 r180 top
U14 "CH340E" MSOP-10_L3.0-W3.0-P0.50-LS5.0-BL -17393.66,14246.8 r0 top
U15 "CH340E" MSOP-10_L3.0-W3.0-P0.50-LS5.0-BL -17526.97,14244.8 r0 top
U16 "DC JW5060T_6" SOT23-6N 556,-566 r90 top
USB1 "USB-A" USB-A 1504,-467 r0 top
USBC1 "TYPE-C 2.0 -16P" USB-C-SMD_16P 912.21,-519.19 r180 top
X1 "12M" XTAL-3225-4P 760.46,783.66 r90 top
X2 "12M" XTAL-3225-4P 631.45,107 r180 top
X3 "AFC07-S18ECA-00" FPC-SMD_AFC07-S18ECA-00 2266,380 r180 bottom locked
X4 "25M" XTAL-3225-4P 2456.8,1962.43 r270 top

## Footprints (in the part's own frame and the unit in brackets; to place one, negate y for a bottom-side part, rotate by r counter-clockwise, add the part's x,y. Pads: shape width x height; smd on the part's side, far side on the other; paste and mask are expansions set on the pad)
C0402_L [mm]
  rect 0.5x0.5 smd: 1(-0.45,0) 2(0.45,0)
  silkscreen extent -0.87,-0.46 0.88,0.46, body extent -0.5,-0.25 0.5,0.25, height 0.5
C0603_L [mm]
  rect 0.75x0.85 smd: 1(-0.725,0) 2(0.725,0)
  silkscreen extent -1.35,-0.69 1.35,0.69, body extent -0.8,-0.4 0.8,0.4, height 0.8
C0805_L [mil]
  rect 35x50 smd: 1(-37.4,0) 2(37.4,0)
  silkscreen extent -67,-36 67,36, body extent -39,-26 39,26, height 51
"CM D(6.3*5.4)" [mm]
  rect 3.2x1.5 smd: 1(2.7,0) 2(-2.7,0)
  silkscreen extent -3.3,-3.3 3.3,3.3
CONN-SMD_60P-P0.50_BTB0.5-60F-2.0G [mm]
  rect 0.25x1.15 smd paste+0 mask+0.051: 1(-7.25,2.425) 2(-7.25,-2.425) 3(-6.75,2.425) 4(-6.75,-2.425) 5(-6.25,2.425) 6(-6.25,-2.425) 7(-5.75,2.425) 8(-5.75,-2.425) 9(-5.25,2.425) 10(-5.25,-2.425) 11(-4.75,2.425) 12(-4.75,-2.425) 13(-4.25,2.425) 14(-4.25,-2.425) 15(-3.75,2.425) 16(-3.75,-2.425) 17(-3.25,2.425) 18(-3.25,-2.425) 19(-2.75,2.425) 20(-2.75,-2.425) 21(-2.25,2.425) 22(-2.25,-2.425) 23(-1.75,2.425) 24(-1.75,-2.425) 25(-1.25,2.425) 26(-1.25,-2.425) 27(-0.75,2.425) 28(-0.75,-2.425) 29(-0.25,2.425) 30(-0.25,-2.425) 31(0.25,2.425) 32(0.25,-2.425) 33(0.75,2.425) 34(0.75,-2.425) 35(1.25,2.425) 36(1.25,-2.425) 37(1.75,2.425) 38(1.75,-2.425) 39(2.25,2.425) 40(2.25,-2.425) 41(2.75,2.425) 42(2.75,-2.425) 43(3.25,2.425) 44(3.25,-2.425) 45(3.75,2.425) 46(3.75,-2.425) 47(4.25,2.425) 48(4.25,-2.425) 49(4.75,2.425) 50(4.75,-2.425) 51(5.25,2.425) 52(5.25,-2.425) 53(5.75,2.425) 54(5.75,-2.425) 55(6.25,2.425) 56(6.25,-2.425) 57(6.75,2.425) 58(6.75,-2.425) 59(7.25,2.425) 60(7.25,-2.425)
  rect 1.6x2.2 smd paste+0 mask+0.051: 61(-9.45,0) 62(9.45,0)
  round 0.65 hole 0.65 unplated paste+0: ""(-8.5,0) ""(8.5,0)
  silkscreen extent -9.8,-2.4 9.8,2.4
dc_in_th_3p_10r1x11r6 [mil]
  oval 94.5x39.4 / inner round 60 / far side oval 94.5x39.4 hole 70.9 slot 15.7 at 90 deg: 1(-111.25,-194.9) 5(-111.25,190.9)
  oval 102.4x43.3 hole 66.9 slot 19.7 at 90 deg: 2(174.25,-51.2) 3(174.25,157.4)
  oval 102.4x43.3 / inner round 60 / far side oval 102.4x43.3 hole 66.9 slot 19.7 at 90 deg: 4(174.25,-177.2)
  round 78.7 hole 78.7 unplated: ""(-69.85,-51.2)
  silkscreen extent -232,-201 226,197, body extent -237,-228 237,228, height 150
DFN2510P10E [mm]
  rect 0.2x0.68 smd: 1(0.075,0.771) 2(0.575,0.771) 4(1.575,0.771) 5(2.075,0.771) 6(2.075,1.641) 7(1.575,1.641) 9(0.575,1.641) 10(0.075,1.641)
  rect 0.4x0.68 smd: 3(1.075,0.771) 8(1.075,1.641)
  silkscreen extent -0.18,-0.13 2.36,2.17
DFN-10_L2.5-W1.0-P0.50-BL-A [mm]
  rect 0.2x0.633 smd paste+0 mask+0.051: 1(-0.938,-0.276) 2(-0.438,-0.276) 4(0.562,-0.276) 5(1.062,-0.276) 6(1.062,0.548) 7(0.562,0.548) 9(-0.438,0.548) 10(-0.938,0.548)
  rect 0.4x0.633 smd paste+0 mask+0.051: 3(0.062,-0.276) 8(0.062,0.548)
  silkscreen extent -1.44,-0.86 1.36,0.69
FB0603 [mm]
  rect 0.75x0.85 smd: 1(-0.725,0) 2(0.725,0)
  silkscreen extent -1.35,-0.69 1.35,0.69, body extent -0.8,-0.4 0.8,0.4, height 0.8
FPC-SMD_37P-P0.50_DEALON_0.5K-DX-37PWB [mm]
  rect 0.3x1.25 smd paste+0 mask+0.05: 1(-9,2.482) 2(-8.5,2.482) 3(-8,2.482) 4(-7.5,2.482) 5(-7,2.482) 6(-6.5,2.482) 7(-6,2.482) 8(-5.5,2.482) 9(-5,2.482) 10(-4.5,2.482) 11(-4,2.482) 12(-3.5,2.482) 13(-3,2.482) 14(-2.5,2.482) 15(-2,2.482) 16(-1.5,2.482) 17(-1,2.482) 18(-0.5,2.482) 19(0,2.482) 20(0.5,2.482) 21(1,2.482) 22(1.5,2.482) 23(2,2.482) 24(2.5,2.482) 25(3,2.482) 26(3.5,2.482) 27(4,2.482) 28(4.5,2.482) 29(5,2.482) 30(5.5,2.482) 31(6,2.482) 32(6.5,2.482) 33(7,2.482) 34(7.5,2.482) 35(8,2.482) 36(8.5,2.482) 37(9,2.482)
  rect 1.27x1.524 smd paste+0 mask+0.05: 38(10.9,-0.044) 39(-10.9,-0.043)
  silkscreen extent -11.95,-2.98 11.95,2.11
FPC-SMD_AFC07-S18ECA-00 [mm]
  rect 0.3x1.5 smd: 1(-4.26,1.133) 2(-3.75,1.133) 3(-3.25,1.133) 4(-2.75,1.133) 5(-2.25,1.133) 6(-1.75,1.133) 7(-1.25,1.133) 8(-0.75,1.133) 9(-0.25,1.133) 10(0.25,1.133) 11(0.75,1.133) 12(1.25,1.133) 13(1.75,1.133) 14(2.25,1.133) 15(2.75,1.133) 16(3.25,1.133) 17(3.75,1.133) 18(4.25,1.133)
  rect 1.372x2.083 smd: 19(5.901,-1.126) 20(-5.901,-1.133)
  silkscreen extent -7.38,-5.22 7.33,0.64
FPC-TOP40 [mm]
  rect 0.25x1.2 smd: 1(0,0.102) 2(0.5,0.102) 3(1,0.102) 4(1.5,0.102) 5(2,0.102) 6(2.5,0.102) 7(3,0.102) 8(3.5,0.102) 9(4,0.102) 10(4.5,0.102) 11(5,0.102) 12(5.5,0.102) 13(6,0.102) 14(6.5,0.102) 15(7,0.102) 16(7.5,0.102) 17(8,0.102) 18(8.5,0.102) 19(9,0.102) 20(9.5,0.102) 21(10,0.102) 22(10.5,0.102) 23(11,0.102) 24(11.5,0.102) 25(12,0.102) 26(12.5,0.102) 27(13,0.102) 28(13.5,0.102) 29(14,0.102) 30(14.5,0.102) 31(15,0.102) 32(15.5,0.102) 33(16,0.102) 34(16.5,0.102) 35(17,0.102) 36(17.5,0.102) 37(18,0.102) 38(18.5,0.102) 39(19,0.102) 40(19.5,0.102)
  rect 1.372x2.083 smd: A(-2.25,2.754) B(21.725,2.754)
  silkscreen extent -2.45,0.71 21.92,5.97
"FU 1206" [mil]
  rect 50x65 smd: 1(-67.5,0) 2(67.5,0)
  silkscreen extent -105,-45 105,45, body extent -63,-32 63,32, height 34
HDMI_SMD_A [mm]
  rect 0.3x2.6 smd: 1(11.75,11.31) 2(11.25,11.31) 3(10.75,11.31) 4(10.25,11.31) 5(9.75,11.31) 6(9.25,11.31) 7(8.75,11.31) 8(8.25,11.31) 9(7.75,11.31) 10(7.25,11.31) 11(6.75,11.31) 12(6.25,11.31) 13(5.75,11.31) 14(5.25,11.31) 15(4.75,11.31) 16(4.25,11.31) 17(3.75,11.31) 18(3.25,11.31) 19(2.75,11.31)
  oval 1.2x2 hole 0.9 slot 1.4 at 90 deg: 20(0,4.59) 21(14.5,4.59)
  oval 1.4x2.6 hole 0.9 slot 2.4 at 90 deg: 22(0,10.55) 23(14.5,10.55)
  silkscreen extent 0,0 14.5,13
HDR2.54-LI-2x14P [mm]
  rect 1.6x1.6 hole 0.9: 1(-16.51,-1.27)
  round 1.6 hole 0.9: 2(-16.51,1.27) 3(-13.97,-1.27) 4(-13.97,1.27) 5(-11.43,-1.27) 6(-11.43,1.27) 7(-8.89,-1.27) 8(-8.89,1.27) 9(-6.35,-1.27) 10(-6.35,1.27) 11(-3.81,-1.27) 12(-3.81,1.27) 13(-1.27,-1.27) 14(-1.27,1.27) 15(1.27,-1.27) 16(1.27,1.27) 17(3.81,-1.27) 18(3.81,1.27) 19(6.35,-1.27) 20(6.35,1.27) 21(8.89,-1.27) 22(8.89,1.27) 23(11.43,-1.27) 24(11.43,1.27) 25(13.97,-1.27) 26(13.97,1.27) 27(16.51,-1.27) 28(16.51,1.27)
  silkscreen extent -17.78,-2.54 17.78,2.54, body extent -17.78,-2.54 17.78,2.54, height 8.5
HDR2.54-LI-2x20P [mm]
  rect 1.6x1.6 hole 0.9: 1(-24.13,-1.27)
  round 1.6 hole 0.9: 2(-24.13,1.27) 3(-21.59,-1.27) 4(-21.59,1.27) 5(-19.05,-1.27) 6(-19.05,1.27) 7(-16.51,-1.27) 8(-16.51,1.27) 9(-13.97,-1.27) 10(-13.97,1.27) 11(-11.43,-1.27) 12(-11.43,1.27) 13(-8.89,-1.27) 14(-8.89,1.27) 15(-6.35,-1.27) 16(-6.35,1.27) 17(-3.81,-1.27) 18(-3.81,1.27) 19(-1.27,-1.27) 20(-1.27,1.27) 21(1.27,-1.27) 22(1.27,1.27) 23(3.81,-1.27) 24(3.81,1.27) 25(6.35,-1.27) 26(6.35,1.27) 27(8.89,-1.27) 28(8.89,1.27) 29(11.43,-1.27) 30(11.43,1.27) 31(13.97,-1.27) 32(13.97,1.27) 33(16.51,-1.27) 34(16.51,1.27) 35(19.05,-1.27) 36(19.05,1.27) 37(21.59,-1.27) 38(21.59,1.27) 39(24.13,-1.27) 40(24.13,1.27)
  silkscreen extent -25.4,-2.54 25.4,2.54, body extent -25.4,-2.54 25.4,2.54, height 8.5
HR911130C_RJ45 [mm]
  rect 1.4x1.4 hole 0.9: 1(-5.715,8.89)
  round 1.4 hole 0.9: 2(-4.445,6.35) 3(-3.175,8.89) 4(-1.905,6.35) 5(-0.635,8.89) 6(0.635,6.35) 7(1.905,8.89) 8(3.175,6.35) 9(4.445,8.89) 10(5.715,6.35)
  round 1.6 hole 1.1: 11(-6.625,-4.9) 12(-4.09,-4.9) 13(4.09,-4.9) 14(6.625,-4.9)
  round 2.54 hole 1.7: B01(-7.75,3.05) B02(7.75,3.05)
  round 0 hole 3.3 unplated: BO3(-5.57,0) BO4(5.57,0)
  silkscreen extent -8.2,-10.9 8.2,10.7
L-2520 [mm]
  rect 1x2.5 smd: 1(-0.9,0) 2(0.9,0)
  silkscreen extent -1.65,-1.47 1.65,1.47
LED0805_G [mil]
  rrect50% 40x50 smd: 1(-38.4,0) 2(38.4,0)
  silkscreen extent -70,-36 82,36, body extent -39,-25 39,25, height 32
LQFP-48_L7.0-W7.0-P0.50-LS9.0-TL [mm]
  oval 1.8x0.28 smd paste+0 mask+0.051: 1(-4.012,2.75) 2(-4.012,2.25) 3(-4.012,1.75) 4(-4.012,1.25) 5(-4.012,0.75) 6(-4.012,0.25) 7(-4.012,-0.25) 8(-4.012,-0.75) 9(-4.012,-1.25) 10(-4.012,-1.75) 11(-4.012,-2.25) 12(-4.012,-2.75) 25(4.088,-2.75) 26(4.088,-2.25) 27(4.088,-1.75) 28(4.088,-1.25) 29(4.088,-0.75) 30(4.088,-0.25) 31(4.088,0.25) 32(4.088,0.75) 33(4.088,1.25) 34(4.088,1.75) 35(4.088,2.25) 36(4.088,2.75)
  oval 0.28x1.8 smd paste+0 mask+0.051: 13(-2.712,-4.05) 14(-2.211,-4.05) 15(-1.712,-4.05) 16(-1.211,-4.05) 17(-0.712,-4.05) 18(-0.211,-4.05) 19(0.288,-4.05) 20(0.789,-4.05) 21(1.288,-4.05) 22(1.789,-4.05) 23(2.288,-4.05) 24(2.789,-4.05) 37(2.789,4.05) 38(2.288,4.05) 39(1.789,4.05) 40(1.288,4.05) 41(0.789,4.05) 42(0.288,4.05) 43(-0.211,4.05) 44(-0.712,4.05) 45(-1.211,4.05) 46(-1.712,4.05) 47(-2.211,4.05) 48(-2.712,4.05)
  silkscreen extent -4.39,-2.75 2.79,3.6
"Micro SD" [mm]
  rect 2.032x2.2 smd: 0(0,0) 0(15.5,0)
  rect 1.2x1.4 smd: 0(0,9.6)
  round 1 hole 1 unplated: 0(2.9,-0.4) 0(10.9,-0.4)
  rect 1.6x1.4 smd: 0(14.7,9.6)
  rect 0.7x1.8 smd: 1(10.1,10.227) 2(9,10.227) 3(7.9,10.227) 4(6.8,10.227) 5(5.7,10.227) 6(4.6,10.227) 7(3.5,10.227) 8(2.4,10.227) 9(1.3,10.227)
  silkscreen extent -0.72,-4.68 16.27,11.75, body extent -0.27,-4.63 16,10.57, height 1.8
MSOP-10_L3.0-W3.0-P0.50-LS5.0-BL [mm]
  oval 0.28x1.62 smd paste+0 mask+0.051: 1(456.035,-344.857) 2(456.535,-344.857) 3(457.035,-344.857) 4(457.535,-344.857) 5(458.035,-344.857) 6(458.035,-340.637) 7(457.535,-340.637) 8(457.035,-340.637) 9(456.535,-340.637) 10(456.035,-340.637)
  silkscreen extent 455.29,-345.01 458.61,-341.68
NC7SZ125M5X [mil]
  rect 28x40 smd: 1(-37.4,-51.18) 2(0,-51.18) 3(37.4,-51.18) 4(37.4,51.18) 5(-37.4,51.18)
  silkscreen extent -63,-100 63,20
NC7WZ07P6X [mil]
  rect 16x20 smd: 1(-25.59,-37.4) 2(0,-37.4) 3(25.59,-37.4) 4(25.59,37.4) 5(0,37.4) 6(-25.59,37.4)
  silkscreen extent -39,-25 39,25
NR2520 [mm]
  rect 0.85x2 smd: 1(-0.825,0) 2(0.825,0)
  silkscreen extent -1.52,-1.27 1.52,1.27, body extent -1.25,-1 1.25,1, height 1.12
PCIEX4 [mm]
  rect 0.7x3.2 smd far side: A1(17.678,-0.897)
  rect 0.7x4.2 smd far side: A2(18.678,-1.397) A3(19.678,-1.397) A4(20.678,-1.397) A5(21.678,-1.397) A6(22.678,-1.397) A7(23.678,-1.397) A8(24.678,-1.397) A9(25.678,-1.397) A10(26.678,-1.397) A11(27.678,-1.397) A12(30.678,-1.397) A13(31.678,-1.397) A14(32.678,-1.397) A15(33.678,-1.397) A16(34.678,-1.397) A17(35.678,-1.397) A18(36.678,-1.397) A19(37.678,-1.397) A20(38.678,-1.397) A21(39.678,-1.397) A22(40.678,-1.397) A23(41.678,-1.397) A24(42.678,-1.397) A25(43.678,-1.397) A26(44.678,-1.397) A27(45.678,-1.397) A28(46.678,-1.397) A29(47.678,-1.397) A30(48.678,-1.397) A31(49.678,-1.397) A32(50.678,-1.397)
  rect 0.7x4.2 smd: B1(17.678,-1.397) B2(18.678,-1.397) B3(19.678,-1.397) B4(20.678,-1.397) B5(21.678,-1.397) B6(22.678,-1.397) B7(23.678,-1.397) B8(24.678,-1.397) B9(25.678,-1.397) B10(26.678,-1.397) B11(27.678,-1.397) B12(30.678,-1.397) B13(31.678,-1.397) B14(32.678,-1.397) B15(33.678,-1.397) B16(34.678,-1.397) B18(36.678,-1.397) B19(37.678,-1.397) B20(38.678,-1.397) B21(39.678,-1.397) B22(40.678,-1.397) B23(41.678,-1.397) B24(42.678,-1.397) B25(43.678,-1.397) B26(44.678,-1.397) B27(45.678,-1.397) B28(46.678,-1.397) B29(47.678,-1.397) B30(48.678,-1.397) B32(50.678,-1.397)
  rect 0.7x3.2 smd: B17(35.678,-0.897) B31(49.678,-0.897)
  Keep-Out Layer pour cut-out: 30.114,2.553 30.118,2.543 30.128,2.539 30.138,2.543 30.142,2.553 30.149,2.553 30.116,2.804 30.019,3.039 29.865,3.24 29.664,3.394 29.429,3.491 29.178,3.524 29.178,3.517 29.168,3.513 29.164,3.503 29.168,3.493 29.178,3.489 29.178,3.498 29.423,3.466 29.651,3.372 29.846,3.221 29.997,3.026 30.091,2.798 30.123,2.553 30.115,2.553
  Keep-Out Layer pour cut-out: 29.178,3.489 29.188,3.493 29.192,3.503 29.188,3.513 29.178,3.517 29.178,3.524 28.927,3.491 28.692,3.394 28.491,3.24 28.337,3.039 28.24,2.804 28.207,2.553 28.214,2.553 28.218,2.543 28.228,2.539 28.238,2.543 28.242,2.553 28.233,2.553 28.265,2.798 28.359,3.026 28.51,3.221 28.705,3.372 28.933,3.466 29.178,3.498 29.178,3.49
  Keep-Out Layer pour cut-out: 17.014,6.028 17.018,6.018 17.028,6.014 17.038,6.018 17.042,6.028 17.05,6.028 17.014,6.388 16.909,6.735 16.738,7.054 16.509,7.334 16.229,7.563 15.91,7.734 15.563,7.839 15.203,7.875 15.203,7.867 15.193,7.863 15.189,7.853 15.193,7.843 15.203,7.839 15.203,7.849 15.558,7.814 15.9,7.71 16.215,7.542 16.491,7.316 16.717,7.04 16.885,6.725 16.989,6.383 17.024,6.028 17.015,6.028
  Keep-Out Layer pour cut-out: 15.203,7.839 15.213,7.843 15.217,7.853 15.213,7.863 15.203,7.867 15.203,7.875 14.843,7.839 14.496,7.734 14.177,7.563 13.897,7.334 13.668,7.054 13.497,6.735 13.392,6.388 13.356,6.028 13.364,6.028 13.368,6.018 13.378,6.014 13.388,6.018 13.392,6.028 13.382,6.028 13.417,6.383 13.521,6.725 13.689,7.04 13.915,7.316 14.191,7.542 14.506,7.71 14.848,7.814 15.203,7.849 15.203,7.84
  Keep-Out Layer pour cut-out: 51.294,-4.445 51.298,-4.455 51.308,-4.459 51.318,-4.455 51.322,-4.445 51.321,-4.445 51.322,7.853 51.318,7.863 51.308,7.867 51.298,7.863 51.294,7.853 51.295,7.853 51.295,-4.445
  Keep-Out Layer pour cut-out: 50.846,-4.887 50.842,-4.897 50.846,-4.907 50.856,-4.911 50.866,-4.907 50.865,-4.906 51.318,-4.455 51.322,-4.445 51.318,-4.435 51.308,-4.431 51.298,-4.435 51.299,-4.436 50.847,-4.888
  Keep-Out Layer pour cut-out: 30.628,-4.883 30.618,-4.887 30.614,-4.897 30.618,-4.907 30.628,-4.911 30.628,-4.91 50.856,-4.911 50.866,-4.907 50.87,-4.897 50.866,-4.887 50.856,-4.883 50.856,-4.884 30.628,-4.884
  Keep-Out Layer pour cut-out: 30.138,-4.387 30.128,-4.383 30.118,-4.387 30.114,-4.397 30.118,-4.407 30.119,-4.406 30.618,-4.907 30.628,-4.911 30.638,-4.907 30.642,-4.897 30.638,-4.887 30.637,-4.888 30.137,-4.388
  Keep-Out Layer pour cut-out: 30.114,-4.397 30.118,-4.407 30.128,-4.411 30.138,-4.407 30.142,-4.397 30.141,-4.397 30.142,2.553 30.138,2.563 30.128,2.567 30.118,2.563 30.114,2.553 30.115,2.553 30.115,-4.397
  Keep-Out Layer pour cut-out: 28.214,-4.397 28.218,-4.407 28.228,-4.411 28.238,-4.407 28.242,-4.397 28.241,-4.397 28.242,2.553 28.238,2.563 28.228,2.567 28.218,2.563 28.214,2.553 28.215,2.553 28.215,-4.397
  Keep-Out Layer pour cut-out: 27.718,-4.887 27.714,-4.897 27.718,-4.907 27.728,-4.911 27.738,-4.907 27.737,-4.906 28.238,-4.407 28.242,-4.397 28.238,-4.387 28.228,-4.383 28.218,-4.387 28.219,-4.388 27.719,-4.888
  Keep-Out Layer pour cut-out: 17.528,-4.883 17.518,-4.887 17.514,-4.897 17.518,-4.907 17.528,-4.911 17.528,-4.91 27.728,-4.911 27.738,-4.907 27.742,-4.897 27.738,-4.887 27.728,-4.883 27.728,-4.884 17.528,-4.884
  Keep-Out Layer pour cut-out: 17.038,-4.387 17.028,-4.383 17.018,-4.387 17.014,-4.397 17.018,-4.407 17.019,-4.406 17.518,-4.907 17.528,-4.911 17.538,-4.907 17.542,-4.897 17.538,-4.887 17.537,-4.888 17.037,-4.388
  Keep-Out Layer pour cut-out: 17.014,-4.397 17.018,-4.407 17.028,-4.411 17.038,-4.407 17.042,-4.397 17.041,-4.397 17.042,6.028 17.038,6.038 17.028,6.042 17.018,6.038 17.014,6.028 17.015,6.028 17.015,-4.397
  Keep-Out Layer pour cut-out: 13.364,-0.397 13.368,-0.407 13.378,-0.411 13.388,-0.407 13.392,-0.397 13.391,-0.397 13.392,6.028 13.388,6.038 13.378,6.042 13.368,6.038 13.364,6.028 13.365,6.028 13.365,-0.397
  Keep-Out Layer pour cut-out: 5.378,-0.383 5.368,-0.387 5.364,-0.397 5.368,-0.407 5.378,-0.411 5.378,-0.41 13.378,-0.411 13.388,-0.407 13.392,-0.397 13.388,-0.387 13.378,-0.383 13.378,-0.384 5.378,-0.384
  Keep-Out Layer pour cut-out: 5.364,-0.397 5.368,-0.407 5.378,-0.411 5.388,-0.407 5.392,-0.397 5.391,-0.397 5.392,7.853 5.388,7.863 5.378,7.867 5.368,7.863 5.364,7.853 5.365,7.853 5.365,-0.397
  Keep-Out Layer pour cut-out: -12.972,7.867 -12.982,7.863 -12.986,7.853 -12.982,7.843 -12.972,7.839 -12.972,7.84 5.378,7.839 5.388,7.843 5.392,7.853 5.388,7.863 5.378,7.867 5.378,7.866 -12.972,7.866
  Keep-Out Layer pour cut-out: -12.986,-0.397 -12.982,-0.407 -12.972,-0.411 -12.962,-0.407 -12.958,-0.397 -12.959,-0.397 -12.958,7.853 -12.962,7.863 -12.972,7.867 -12.982,7.863 -12.986,7.853 -12.985,7.853 -12.985,-0.397
  Keep-Out Layer pour cut-out: -27.972,-0.383 -27.982,-0.387 -27.986,-0.397 -27.982,-0.407 -27.972,-0.411 -27.972,-0.41 -12.972,-0.411 -12.962,-0.407 -12.958,-0.397 -12.962,-0.387 -12.972,-0.383 -12.972,-0.384 -27.972,-0.384
  Keep-Out Layer pour cut-out: 51.308,7.867 51.298,7.863 51.294,7.853 51.298,7.843 51.308,7.839 51.308,7.84 127.222,7.839 127.232,7.843 127.236,7.853 127.232,7.863 127.222,7.867 127.222,7.866 51.308,7.866
"QFN40 5X5_N" [mm]
  rect 0.2x0.7 smd mask+0.05: 1(-1.8,-2.45) 2(-1.4,-2.45) 3(-1,-2.45) 4(-0.6,-2.45) 5(-0.2,-2.45) 6(0.2,-2.45) 7(0.6,-2.45) 8(1,-2.45) 9(1.4,-2.45) 10(1.8,-2.45) 21(1.8,2.45) 22(1.4,2.45) 23(1,2.45) 24(0.6,2.45) 25(0.2,2.45) 26(-0.2,2.45) 27(-0.6,2.45) 28(-1,2.45) 29(-1.4,2.45) 30(-1.8,2.45)
  rect 0.7x0.2 smd mask+0.05: 11(2.45,-1.8) 12(2.45,-1.4) 13(2.45,-1) 14(2.45,-0.6) 15(2.45,-0.2) 16(2.45,0.2) 17(2.45,0.6) 18(2.45,1) 19(2.45,1.4) 20(2.45,1.8) 31(-2.45,1.8) 32(-2.45,1.4) 33(-2.45,1) 34(-2.45,0.6) 35(-2.45,0.2) 36(-2.45,-0.2) 37(-2.45,-0.6) 38(-2.45,-1) 39(-2.45,-1.4) 40(-2.45,-1.8)
  rect 3.8x3.8 smd mask+0.05: 41(0,0)
  silkscreen extent -2.5,-3.4 2.5,2.5, body extent -2.5,-2.5 2.5,2.5, height 0.74
R0402_L [mm]
  rect 0.5x0.5 smd: 1(-0.425,0) 2(0.425,0)
  silkscreen extent -0.88,-0.46 0.87,0.46, body extent -0.5,-0.25 0.5,0.25, height 0.3
R0603_L [mm]
  rect 0.75x0.85 smd: 1(-0.725,0) 2(0.725,0)
  silkscreen extent -1.35,-0.69 1.35,0.69, body extent -0.8,-0.4 0.8,0.4, height 0.4
SMB [mm]
  rect 2.3x2.3 smd: 1(-2.25,0) 2(2.25,0)
  silkscreen extent -3.8,-1.55 4.1,1.55
SOT23 [mil]
  rect 36x36 smd: 1(0,0) 2(75,0)
  rect 36x50 smd: 3(38,80)
  silkscreen extent -20,-5 95,85
SOT23-6N [mm]
  rect 1x0.55 smd: 1(1.3,-0.95) 2(1.3,0) 3(1.3,0.95) 4(-1.3,0.95) 5(-1.3,0) 6(-1.3,-0.95)
  silkscreen extent -0.51,-1.78 1.78,1.55
SOT-23-5 [mm]
  rect 1.05x0.6 smd: 1(-1.2,0.95) 2(-1.2,0) 3(-1.2,-0.95) 4(1.2,-0.95) 5(1.2,0.95)
  silkscreen extent -1.32,-1.55 0.3,1.92, body extent -1.4,-1.5 1.4,1.5, height 1.15
SOT-23-6_L2.9-W1.6-P0.95-LS2.8-BR [mm]
  rect 1.1x0.6 smd paste+0 mask+0.051: 1(1.35,-0.899) 2(1.35,0.051) 3(1.35,1.001) 4(-1.35,1.001) 5(-1.35,0.051) 6(-1.35,-0.899)
  silkscreen extent -0.9,-1.73 1.52,1.6
SOT-23_N [mm]
  rect 1.15x0.6 smd: 1(-1.125,0.95) 2(-1.125,-0.95) 3(1.125,0)
  silkscreen extent -1.25,-1.5 0.7,1.92, body extent -0.7,-1.5 0.7,1.5, height 1.1
SSOP-16_L4.9-W3.9-P0.64-LS6.0-BL [mil]
  oval 14x71.45 smd paste+0 mask+2: 1(17916.92,-13588.69) 2(17941.92,-13588.69) 3(17966.92,-13588.69) 4(17991.92,-13588.69) 5(18016.92,-13588.69) 6(18041.92,-13588.69) 7(18066.92,-13588.69) 8(18091.92,-13588.69) 9(18091.92,-13379.64) 10(18066.92,-13379.64) 11(18041.92,-13379.64) 12(18016.92,-13379.64) 13(17991.92,-13379.64) 14(17966.92,-13379.64) 15(17941.92,-13379.64) 16(17916.92,-13379.64)
  silkscreen extent 17886,-13595 18104,-13424
SW-SMD_L3.9-W2.9-P4.15-LS5.0 [mm]
  rect 1.35x2 smd paste+0 mask+0.051: 1(-2.25,0) 2(2.25,0)
  silkscreen extent -2,-1.45 2,1.45
"TEST 1.6" [mil]
  round 20 smd paste-62.99: 1(0,0)
  silkscreen extent -40,-40 40,40
TPS2051BDBV [mm]
  rect 1x0.7 smd: 1(-1.104,0.95) 2(-1.104,0) 3(-1.104,-0.95) 4(1.496,-0.95) 5(1.496,0.95)
  silkscreen extent -2,-1.16 0.9,1.23
USB-A [mm]
  rect 1x1.5 smd: 1(-3.5,3.77) 2(-1,3.77) 3(1,3.77) 4(3.5,3.77)
  rect 1.524x2.286 smd paste+0 mask+0.102: 5(-6.985,-3.683) 6(6.985,-3.683)
  rect 2x1.6 smd: 7(-7.25,2.23) 8(7.25,2.23)
  silkscreen extent -6.35,-6.39 6.35,3.77
USB-C-SMD_16P [mm]
  oval 1.2x2.3 hole 0.7 slot 1.8 at 90 deg: 0(-4.5,-1.675) 0(4.5,-1.675)
  oval 1.2x2 hole 0.8 slot 1.6 at 90 deg: 0(-4.5,2.475) 0(4.5,2.475)
  rect 0.3x1.15 smd: A1(3.35,-2.473) A4(2.55,-2.471) A5(1.25,-2.475) A6(0.25,-2.475) A7(-0.25,-2.473) A9(-2.55,-2.475) A12(-3.35,-2.475) B1(-3.05,-2.475) B4(-2.25,-2.475) B5(-1.75,-2.475) B6(-0.75,-2.475) B7(0.75,-2.473) B9(2.25,-2.471) B12(3.05,-2.473)
  rect 0.3x1.148 smd: A8(1.75,-2.475) B8(-1.25,-2.475)
  round 0.75 hole 0.75 unplated: ""(-2.89,-1.175) ""(2.89,-1.175)
  silkscreen extent -4.56,-2.75 4.5,5.08, body extent -4.45,-2.87 4.49,5.03, height 3.25
XTAL-3225-4P [mm]
  rect 1.3x1.2 smd: 1(-1.05,-0.85) 2(1.05,-0.85) 3(1.05,0.85) 4(-1.05,0.85)
  silkscreen extent -2.03,-1.75 1.91,1.65, body extent -1.6,-1.25 1.6,1.25, height 0.7

## Part data
C1 C2 C3 C4 C5 C6 C7 C8 C9 C10 C11 C12 C13 C14 C15 C16 C17 C18 C19 C21 C22 C23 C24 C25 C26 C27 C28 C29 C30 C31 C32 C33 C34 C35 C36 C37 C38 C39 C40 C41 C42 C43 C44 C45 C46 C47 C48 C49 C50 C51 C52 C53 C54 C55 C56 C57 C58 C59 C60 C62 C63 C64 C65 C66: library part C, "贴片电容/MLCC电容"
C61: library part CAP
D3: "Silicon Switching Diode for High-Speed Switching"
D6 D7 D8: "肖特基二极管"
FB2 FB6 FB7: library part FB, "贴片磁珠"
HDMI_A1: library part HDMI_A
JP2: library part "Header 14X2", "14*2P接插件"
JP4: library part "Header 20X2", "20*2P接插件"
L1: library part L-NR, "L-2520-4.7uH-20%-1.2A(屏蔽,SWPA)"
L2: library part L, "小功率贴片电感磁珠"
LED1 LED2 LED3 LED4 LED5 LED6 LED7: library part LED, "贴片LED"
R1 R2 R3 R4 R5 R6 R7 R8 R9 R10 R11 R12 R13 R14 R15 R16 R17 R18 R19 R20 R21 R22 R23 R24 R25 R26 R27 R28 R29 R30 R31 R32 R33 R34 R35 R36 R38 R41 R42 R43 R44 R45 R46 R48 R49 R50 R51 R52 R53 R54 R55 R56 R57 R58 R59 R60 R61 R62 R63 R64 R65 R66 R67 R68 R69 R70 R71 R72 R73 R74 R75 R76 R77 R78 R79 R80 R81 R82 R83 R84 R85 R86 R87 R96 R97 R98 R99 R100 R101 R102 R103 R104 R105 R106 R107 R108 R109 R110 R111 R112 R113 R114 R115 R116: library part R, "贴片电阻"
"RGB TFTLCD?": library part FPC-40, "FPC-40P-0.5mm"
RJ1: library part HR911130C, "RJ45 + MAG"
TP1 TP2: "测试点"
U5: library part NC7WZ07P6X
U6: library part NC7SZ125M5X
U7: library part ME6211C33, "LDO 3.3V/0.5A"
U8: library part TPS2051BDBV
U11: "Micro SD卡"
U12: "千兆以太网PHY"
U16: "DC降压芯片"
USBC1: library part USB2.0_Type-C_16Pin, "USB2.0_Type-C_16Pin母座"
X1 X2 X4: library part XTAL-4P, "4脚无源晶振(谐振器）"

## Via types
v1: diameter 17.7, hole 7.9, Top Layer to Bottom Layer, tented both sides, 543 vias

## Nets (pads, with @x,y where several pads share a name; then routed paths per layer and width w, separated by ;. In a path a pad name is that pad's centre, name@x,y a point inside that pad or via, vN(x,y) a via of type N, cw(c..) or ccw(c..) an arc to the next point about the centre after c; other vN are vias at no path point)
1V05_AVDD_GMII: C28.2 C29.2 C30.2 FB2.1 U12.3 U12.8 U12.38 | length 948.3
  Top Layer w12: U12.8@2197.43,2045.89 2198.46,2046.92 2198.46,2067.01 v1(2199.49,2068.04) ; U12.3@2276.17,2045.89 v1(2276.17,2064.73) ; U12.38@2333.26,1988.8 v1@2365.17,1988.8 ; v1@2366.3,1989.93 2379.8,2003.43 2379.8,2045.43 2411.8,2077.43 2534.8,2077.43 2568.8,2043.43 2568.8,1823.43 2529.34,1783.98 FB2.1@2475.8,1783.98
  Bottom Layer w12: C30.2@2197.43,2045.89 2198.46,2046.92 2198.46,2067.01 v1(2199.49,2068.04) 2201.03,2068.04 2204.35,2064.73 v1(2276.17,2064.73) C29.2@2276.17,2045.89 2302,2020.06 2302,2010 2321.72,1990.28 2365.96,1990.28 v1(2366.8,1989.43) 2366.8,1988.72 C28.2@2347.52,1969.43
1V05_DVDD_GMII: C33.2 C34.2 C35.2 FB2.2 L1.2 U12.21 | length 660.6
  Top Layer w10: v1(2093,1829) 2104,1840 2110.47,1840 2111.61,1838.87 2126.39,1838.87 2127.53,1840 2152.96,1840 2157.15,1844.2 2164.87,1844.2 2165.93,1845.26 U12.21@2165.93,1852.98 ; v1(2399.6,1720.43) 2406.06,1726.89 FB2.2@2475.8,1726.89
  Bottom Layer w10: C34.2@2120,1821.28 2115.16,1826.13 2097.96,1826.13 2095.08,1829 v1(2093,1829) 2062,1798 2062,1716 2088,1690 2355,1690 2362.6,1697.6 v1(2362.6,1720.43)